# Altium PCB PCB1.PcbDoc
Units mm, origin at the board's own origin, x right, y up, seen from the top; angles counter-clockwise.
Board outline 47 x 47 mm, 4 copper layers (Top Layer, PowerAndSingle, Ground, Bottom Layer), stack 0.999 mm thick; 109 components, 73 nets, 430 pads, 292 vias.
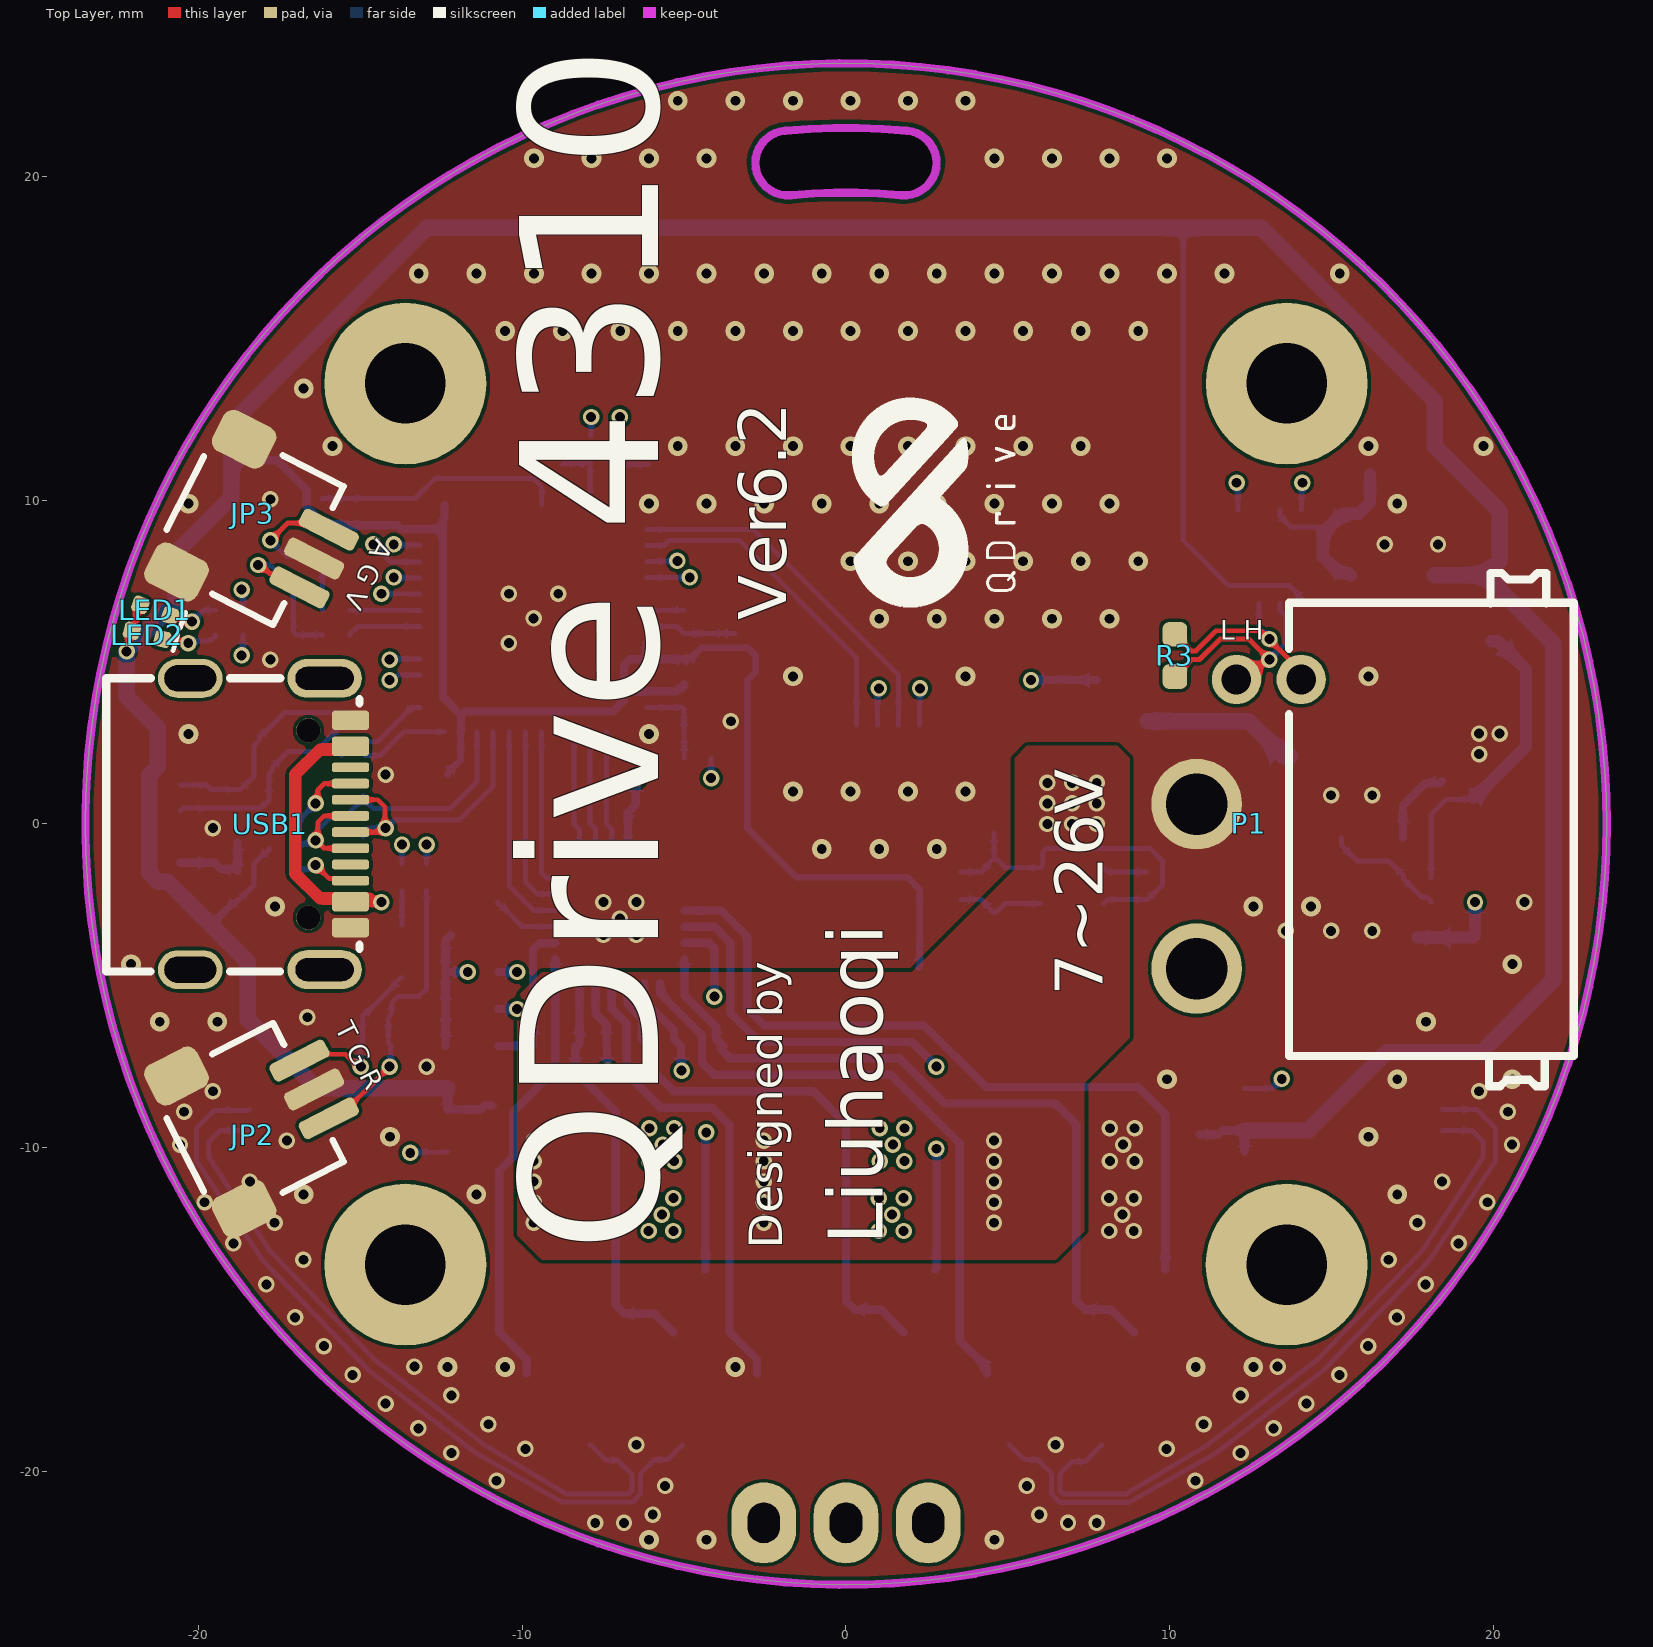
[diagram p0: Top Layer view]
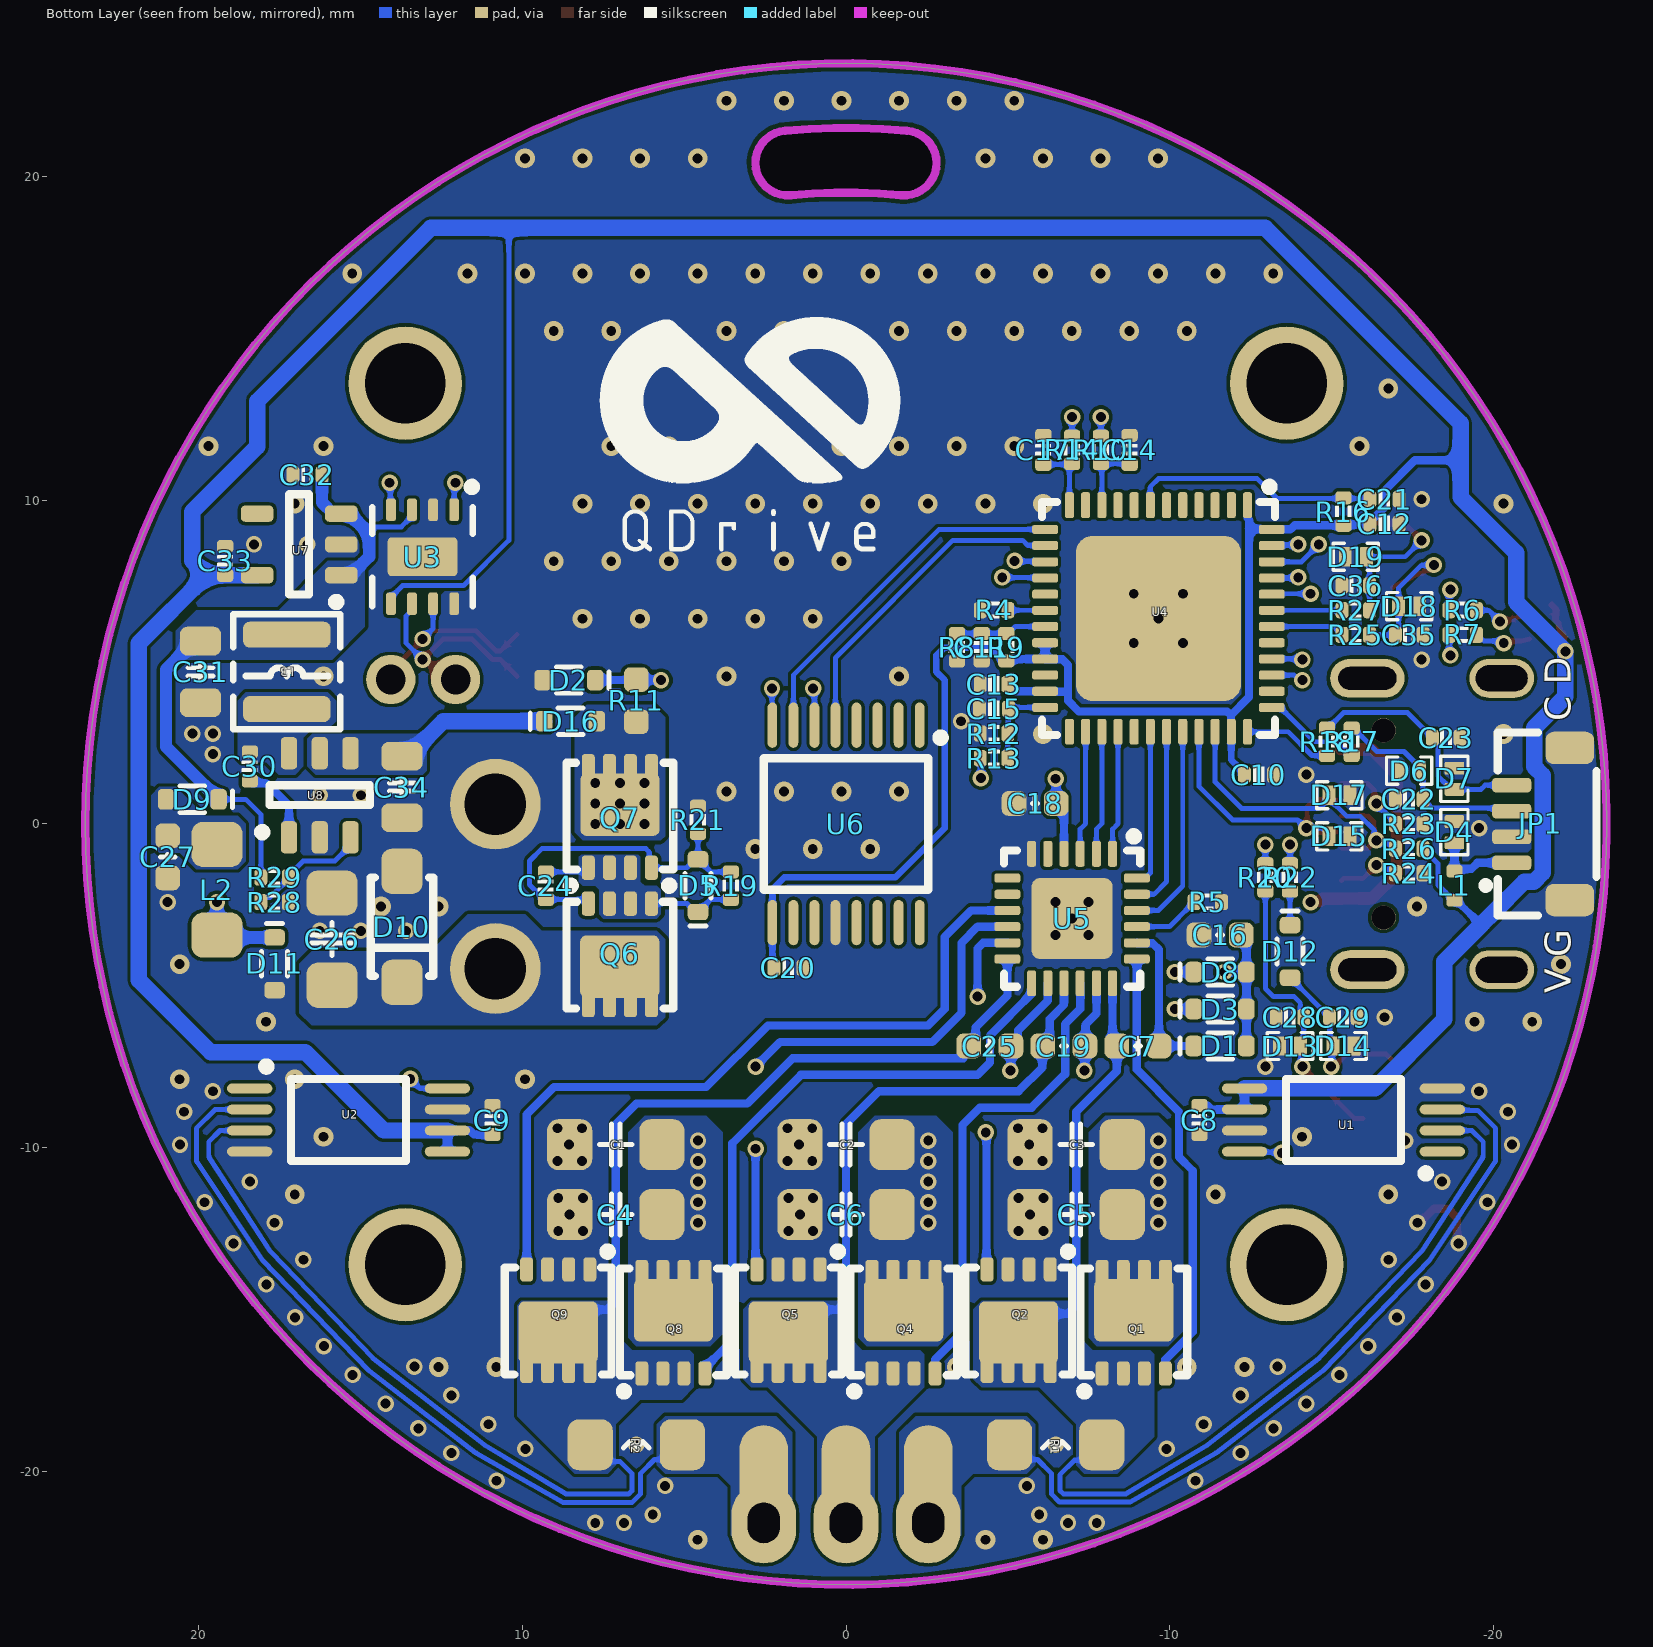
[diagram p1: Bottom Layer view, seen from below]
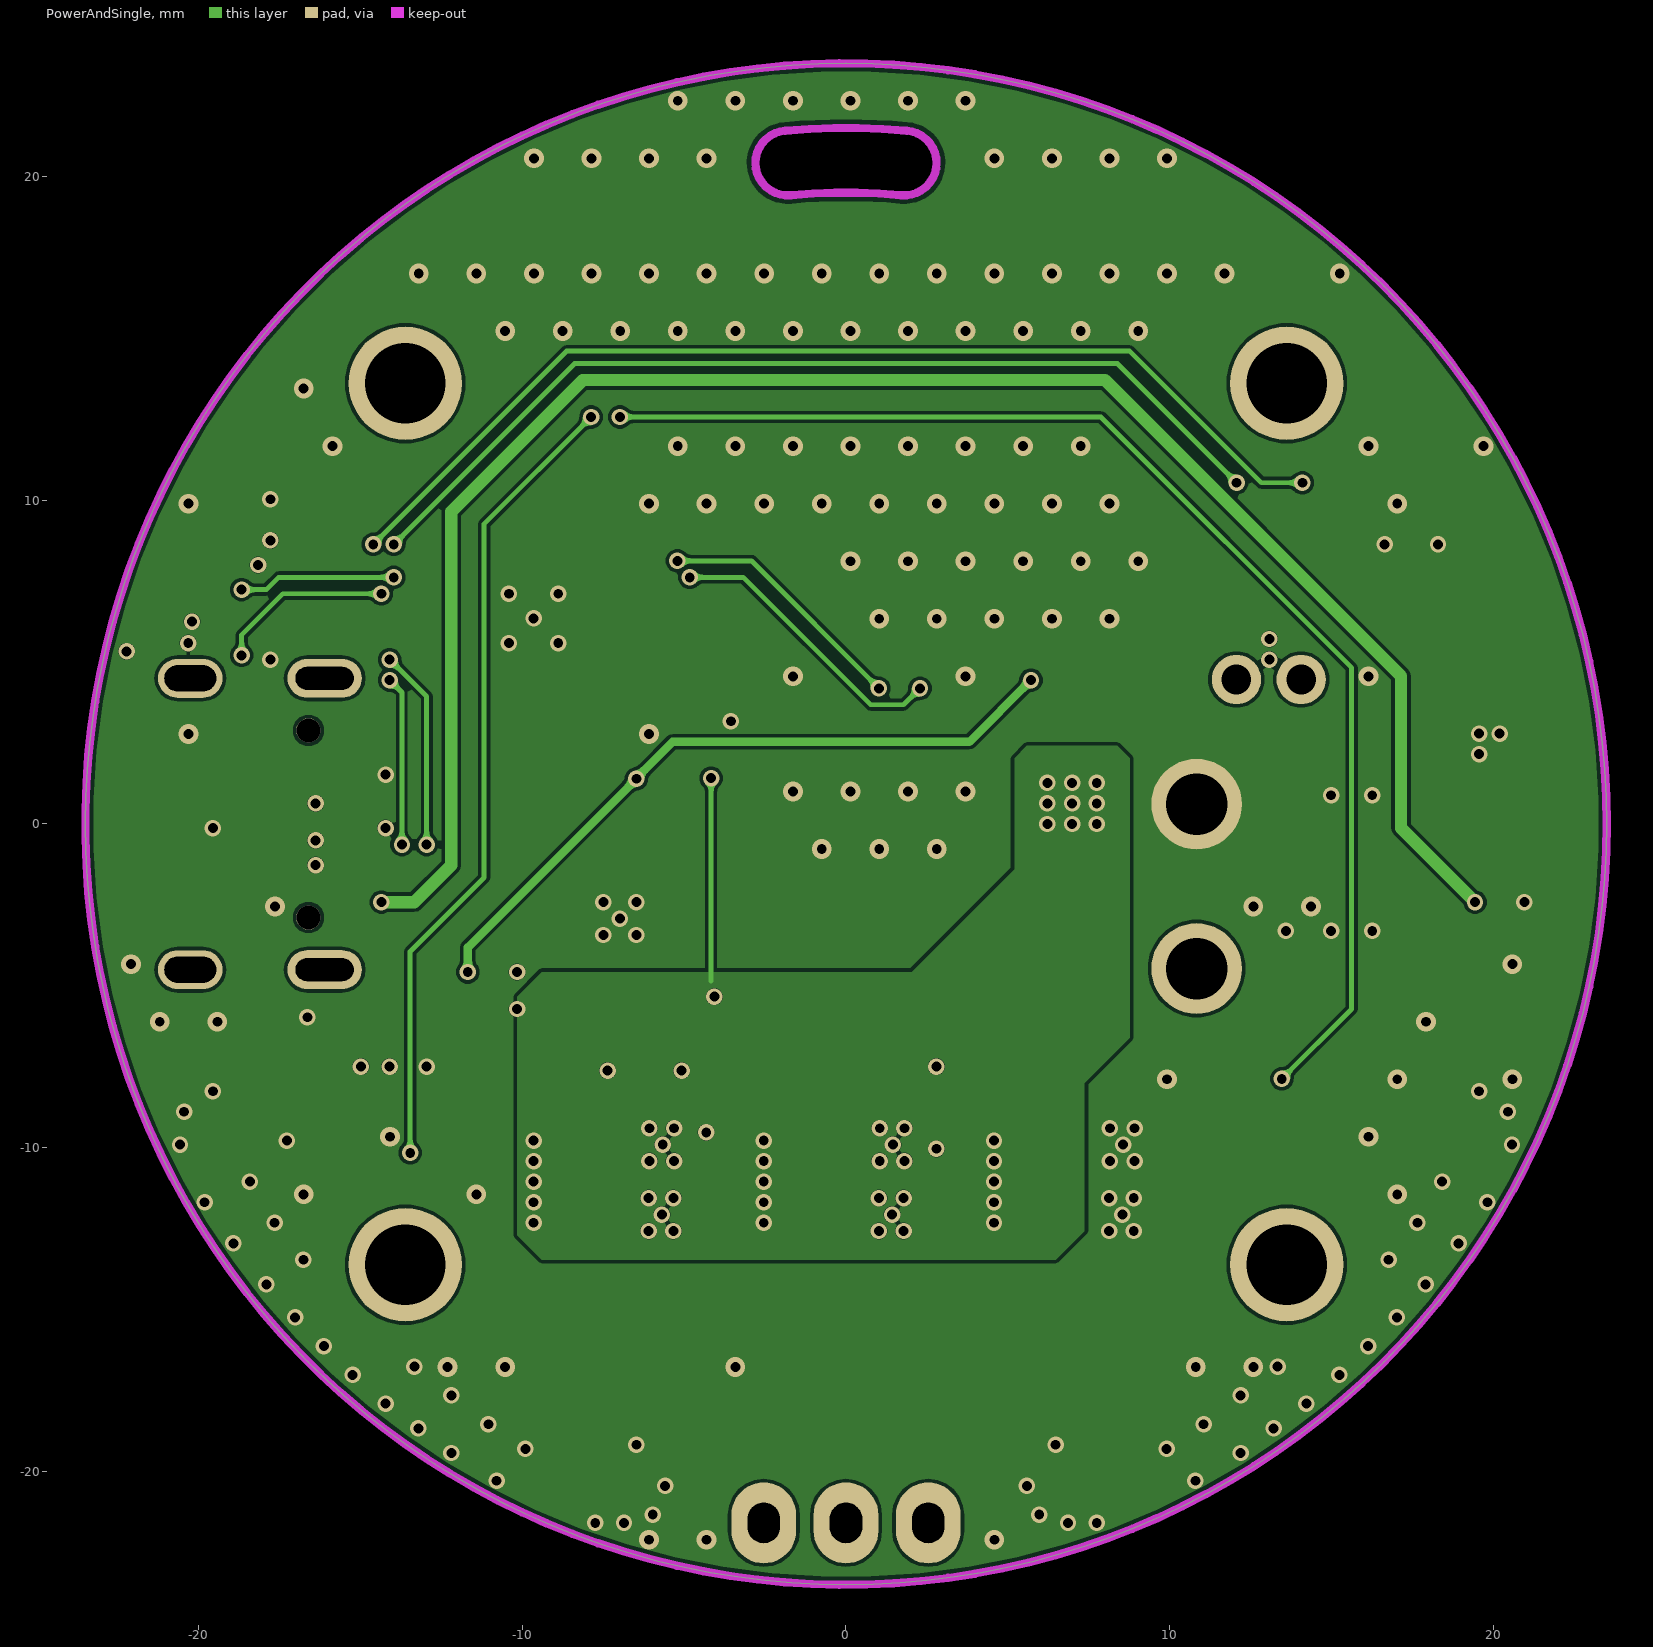
[diagram p2: PowerAndSingle]
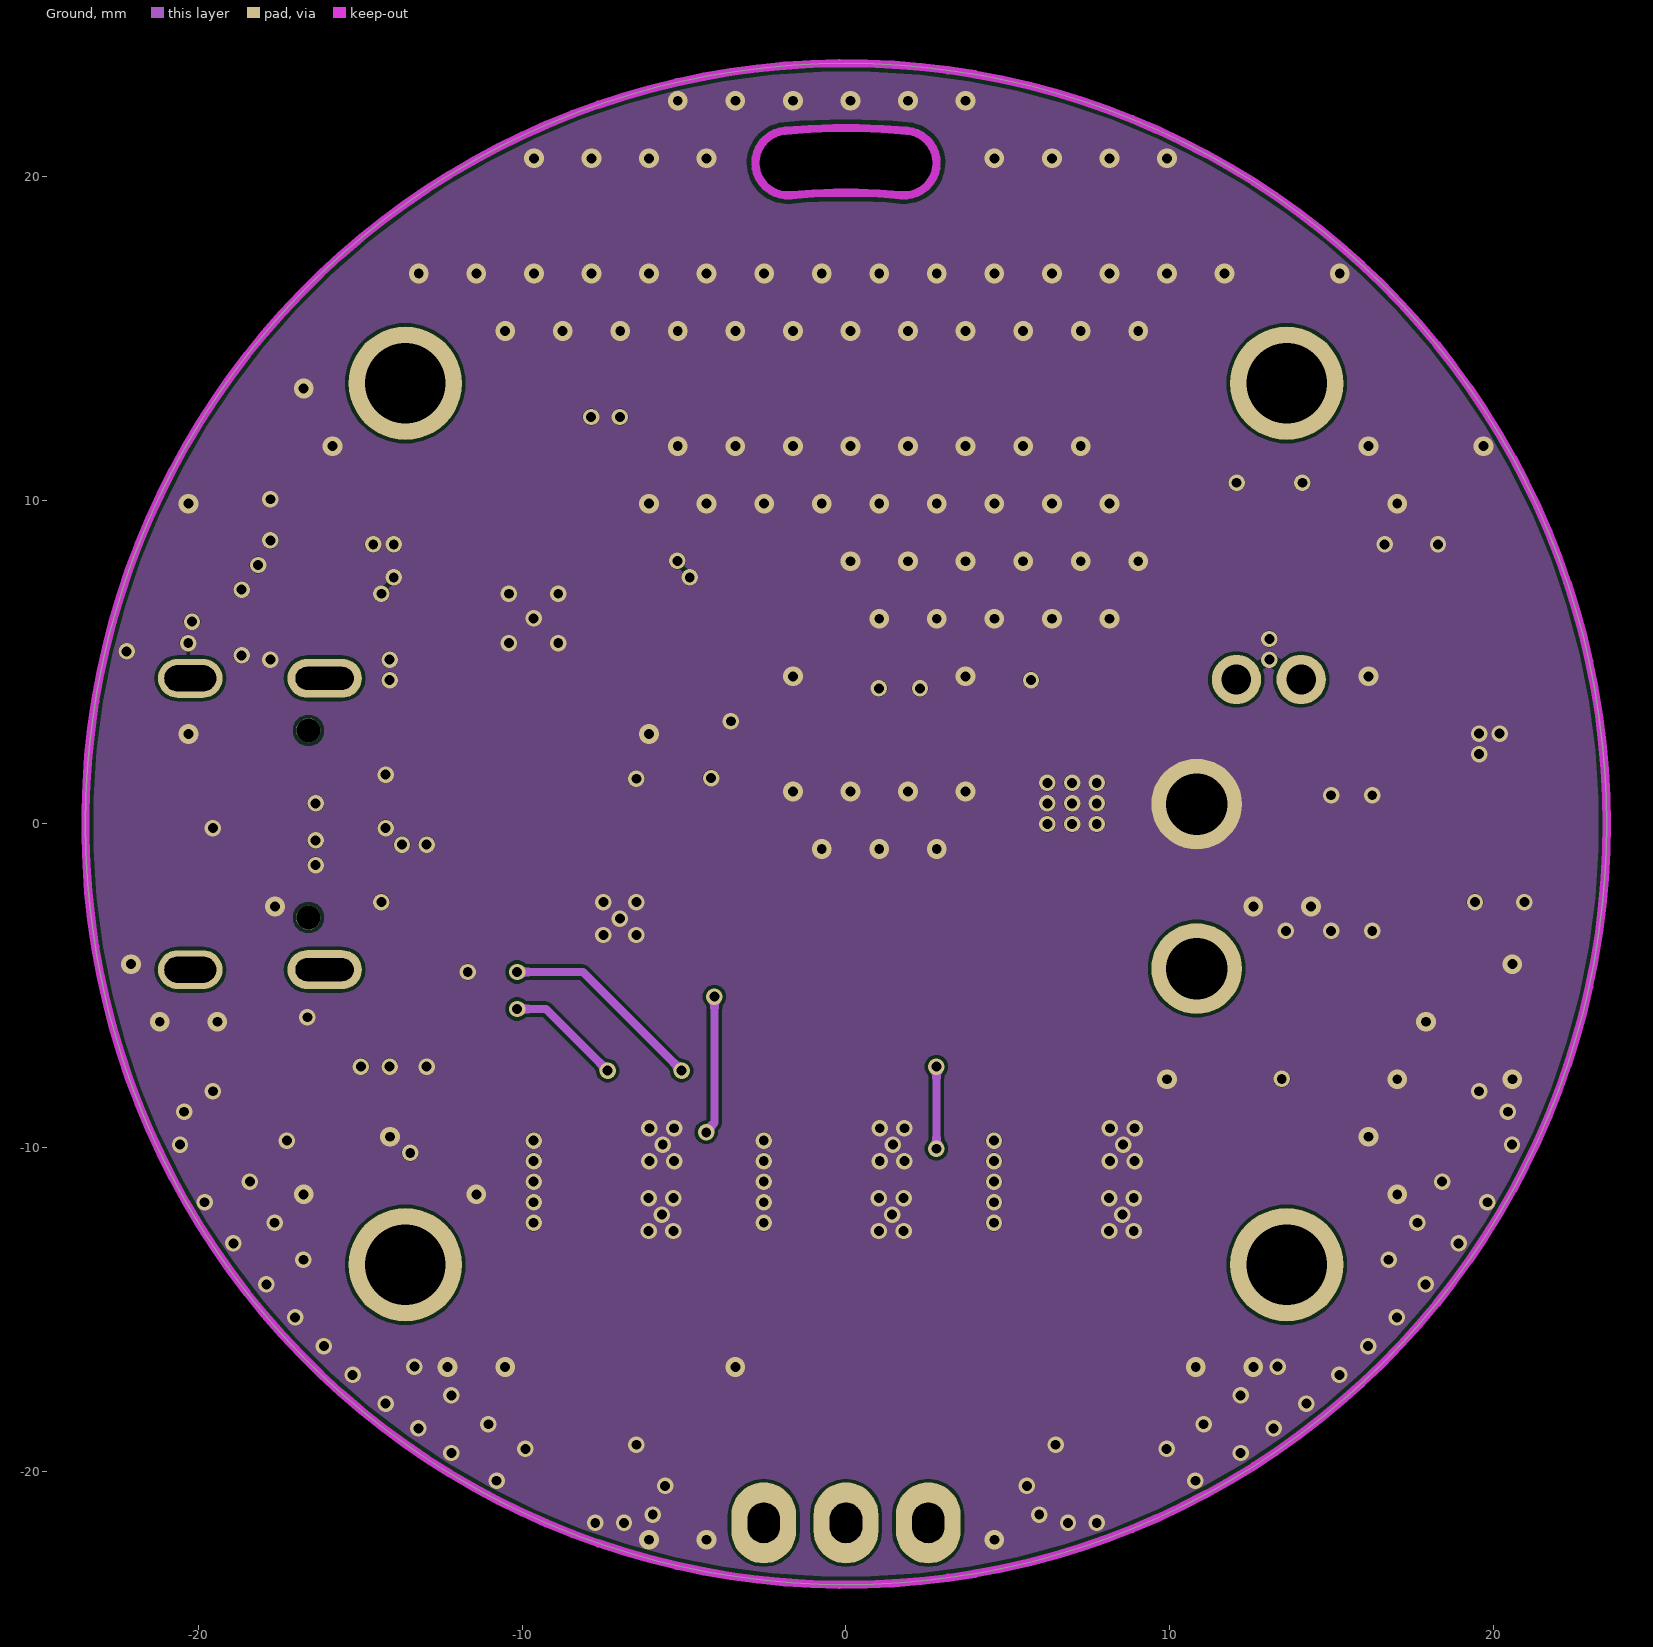
[diagram p3: Ground]
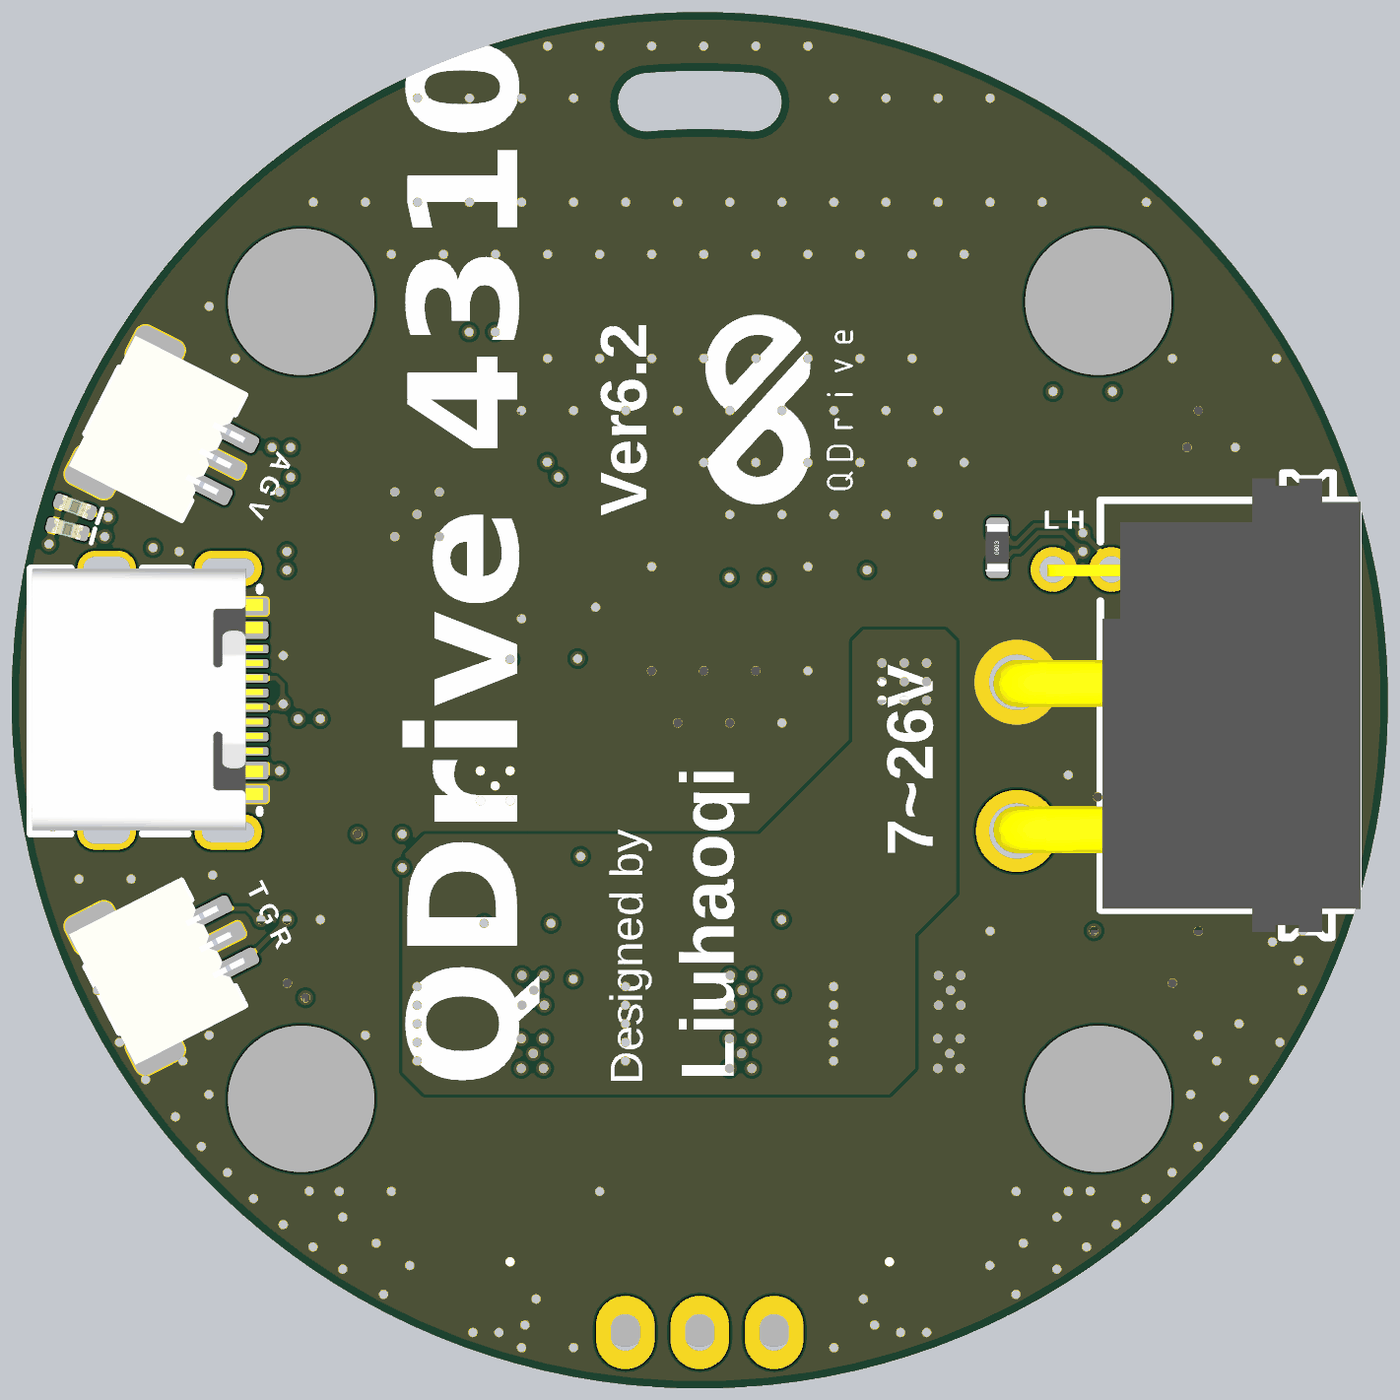
[diagram p4: 3D render of the assembled board from above, using the file's embedded part models]
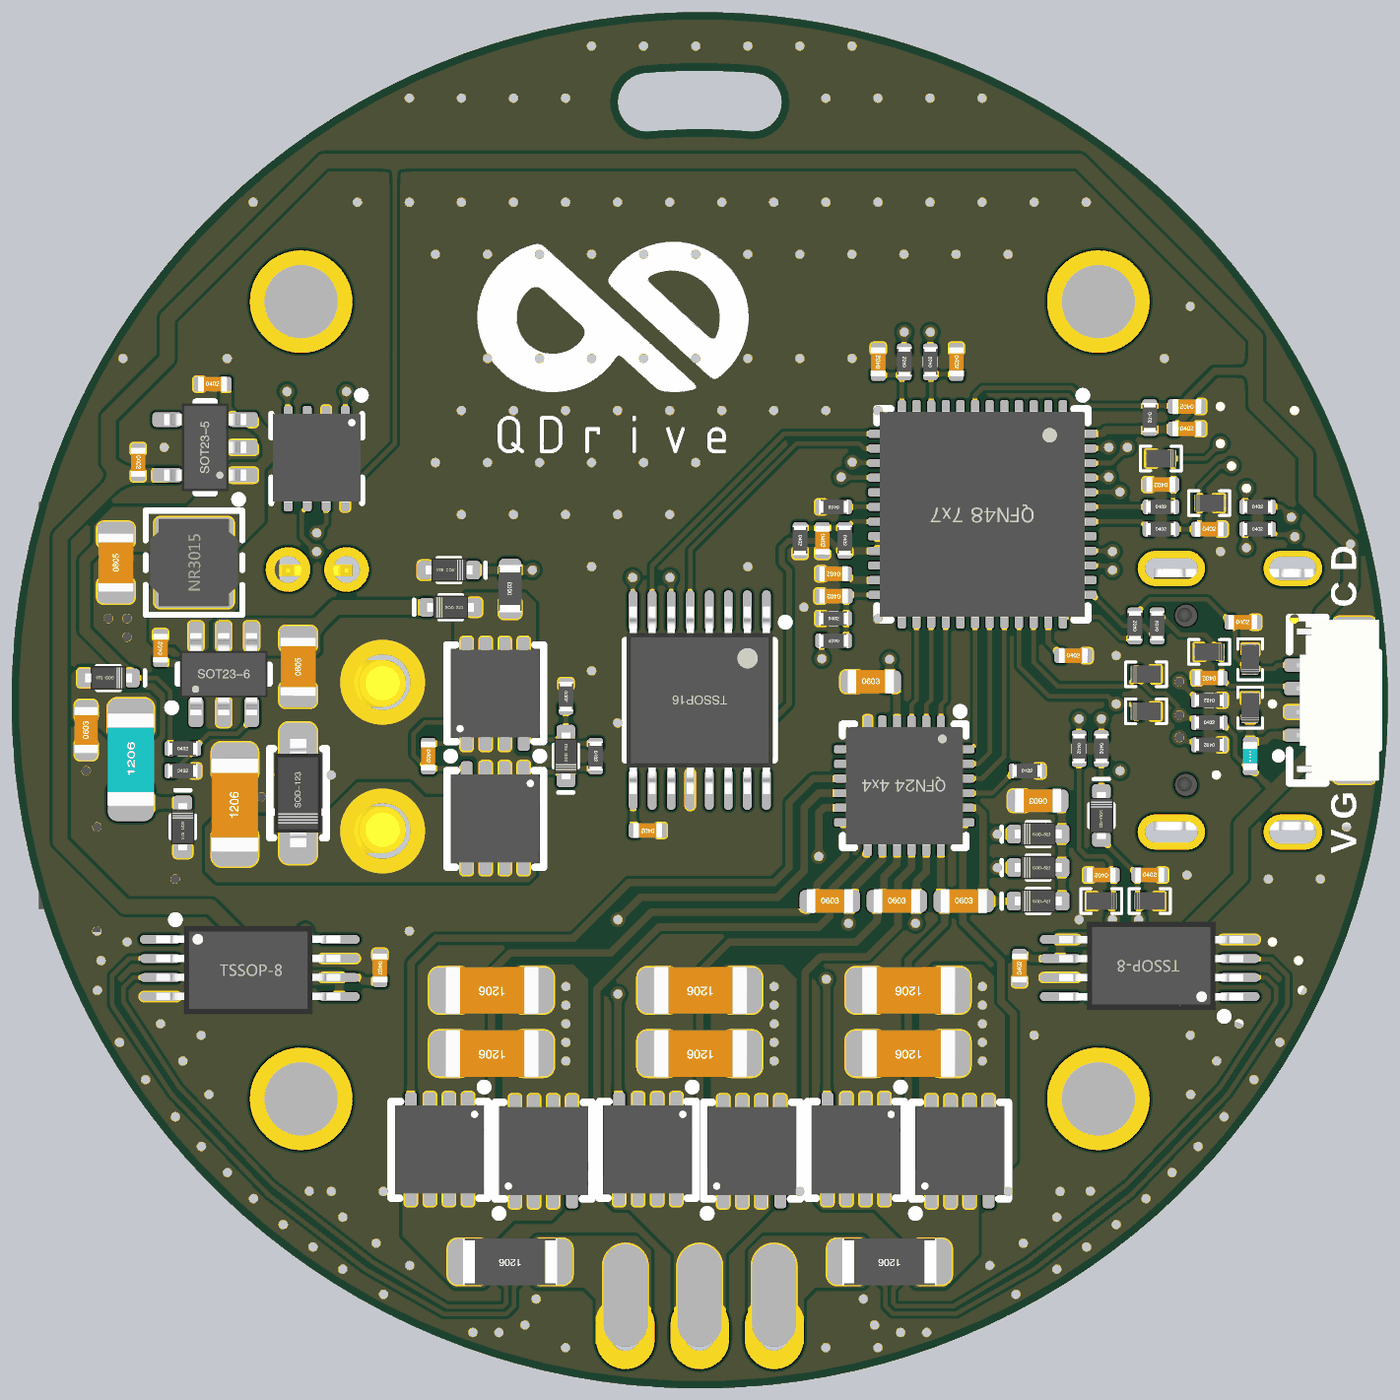
[diagram p5: 3D render of the assembled board from below, using the file's embedded part models]

## Layer stack, top to bottom
Top Solder: solder mask 0.0004, Solder Resist, Dk 3.5
Top Layer: signal copper 0.035
Dielectric 2: prepreg 0.0994, PP-006, Dk 4.1
PowerAndSingle: signal copper 0.0152
Dielectric 1: dielectric 0.7, FR-4, Dk 4.8
Ground: signal copper 0.0152
Dielectric 3: prepreg 0.0994, PP-006, Dk 4.1
Bottom Layer: signal copper 0.035
Bottom Solder: solder mask 0.0004, Solder Resist, Dk 3.5

## Board outline
0,-23.5 cw(c0,0) -23.5,0 cw(c0,0) 0,23.5 cw(c0,0) 23.5,0 cw(c0,0)
cut-out: -1.7,19.426 cw(c-1.799,20.421) -1.874,21.418 cw(c0,0) 1.874,21.418 cw(c1.799,20.421) 1.7,19.426 ccw(c0,0)

## Design rules (kind name [scope] priority, off if disabled: settings)
AcuteAngle [All] p1: minimum=4.50000000000000E+0001 checktracksonly=FALSE
BoardOutlineClearance [All] p1: gap=0.254 ignorepadtopadclearanceinfootprint=FALSE
Clearance [All] p1: gap=0.102 ignorepadtopadclearanceinfootprint=TRUE
ComponentClearance [All] p1: gap=0.241 collisioncheckmode=3 verticalgap=0.241 showdistances=FALSE
DiffPairsRouting DiffPairs_90OhmRouting [InDifferentialPairClass('DiffPair_90Ohm')] p1: maxlimit=0.254 minlimit=0.102 mostfreqgap=0.152 toplayer_minwidth=0.102 toplayer_maxwidth=0.381 toplayer_prefwidth=0.152 midlayer1_minwidth=0.102 midlayer1_maxwidth=0.381 midlayer1_prefwidth=0.152 midlayer2_minwidth=0.102 midlayer2_maxwidth=0.381 midlayer2_prefwidth=0.152 bottomlayer_minwidth=0.102 bottomlayer_maxwidth=0.381 bottomlayer_prefwidth=0.152 maxuncoupledlength=12.7
DiffPairsRouting [All] p2: maxlimit=0.254 minlimit=0.102 mostfreqgap=0.152 toplayer_minwidth=0.102 toplayer_maxwidth=0.381 toplayer_prefwidth=0.152 midlayer1_minwidth=0.102 midlayer1_maxwidth=0.381 midlayer1_prefwidth=0.152 midlayer2_minwidth=0.102 midlayer2_maxwidth=0.381 midlayer2_prefwidth=0.152 bottomlayer_minwidth=0.102 bottomlayer_maxwidth=0.381 bottomlayer_prefwidth=0.152 maxuncoupledlength=12.7
HoleSize [All] p1: absolutevalues=TRUE maxlimit=2.54 minlimit=0.127 maxpercent=80.000 minpercent=20.000
MinimumAnnularRing [All] p1: minimumring=0.076
MinimumSolderMaskSliver [All] p1: minsoldermaskwidth=0.081
PlaneClearance [All] p1: clearance=0.254
PlaneConnect [All] p1: planeconnectstyle=Direct reliefexpansion=0.508 reliefentries=4 reliefconductorwidth=0.254 reliefairgap=0.254
PolygonConnect [All] p1: connectstyle=Direct reliefconductorwidth=0.254 reliefentries=4 polygonreliefangle="90 Angle" airgapwidth=0.254
RoutingVias [All] p1: holewidth=0.305 width=0.61 viastyle="Through Hole" minholewidth=0.305 minwidth=0.406 maxholewidth=0.762 maxwidth=1.27
SMDEntry [All] p1: side=TRUE corner=TRUE anyangle=FALSE
SMDToCorner [All] p1: distance=0
SMDToPlane [All] p1: distance=0
SilkToSilkClearance [All] p1: silktosilkclearance=0
SilkToSolderMaskClearance [IsPad] p1: minsilkscreentomaskgap=0 clearancetoexposedcopper=TRUE
SolderMaskExpansion SolderMaskExpansion_Vias [IsVia] p1: expansion=0.064 istentingtop=TRUE
SolderMaskExpansion [All] p2: expansion=0.051 istentingtop=FALSE
SupplyNets "Schematic Supply Nets_5" [InNet('GVDD')] p1: voltage=0.000
SupplyNets "Schematic Supply Nets_4" [InNet('VBAT_IN')] p2: voltage=0.000
SupplyNets "Schematic Supply Nets_3" [InNet('GND')] p3: voltage=0.000
SupplyNets "Schematic Supply Nets_2" [InNet('+5')] p4: voltage=0.000
SupplyNets "Schematic Supply Nets_1" [InNet('VBAT')] p5: voltage=0.000
SupplyNets "Schematic Supply Nets" [InNet('+3.3')] p6: voltage=0.000
UnRoutedNet [All] p1: checkbadconnections=TRUE
Width [All] p1: maxlimit=7.62 minlimit=0.102 preferedwidth=0.254
21 further rules are at their usual default settings.

## Classes and differential pairs
net class POWER: +3.3 +5 VBAT VBUS

## Components (designator, comment, footprint, x,y, rotation, side; value= is the part's Value field where it differs from the comment)
C1 "22UF@35V" C1206_NS 7.112,-9.906 r0 bottom
C2 "22UF@35V" C1206_NS 0,-9.906 r0 bottom
C3 "22UF@35V" C1206_NS -7.112,-9.906 r0 bottom
C4 "22UF@35V" C1206_NS 7.112,-12.065 r0 bottom
C5 "22UF@35V" C1206_NS -7.112,-12.065 r0 bottom
C6 "22UF@35V" C1206_NS 0,-12.065 r0 bottom
C7 "1UF" C0603_NS -9.017,-6.858 r180 bottom
C8 "0.1UF" C0402_NS#1 -10.922,-9.144 r90 bottom
C9 "0.1UF" C0402_NS#1 10.922,-9.144 r270 bottom
C10 "0.1UF" C0402_NS#1 -12.758,1.524 r180 bottom
C11 "0.1UF" C0402_NS#2 -4.191,5.461 r270 bottom
C12 "0.1UF" C0402_NS#1 -16.637,9.271 r180 bottom
C13 "0.1UF" C0402_NS#2 -4.572,4.318 r0 bottom
C14 "0.1UF" C0402_NS#1 -8.763,11.557 r270 bottom
C15 "0.1UF" C0402_NS#1 -4.572,3.556 r0 bottom
C16 "1UF@35V" C0603_NS -11.557,-3.429 r0 bottom
C17 "0.1UF" C0402_NS#1 -6.096,11.557 r90 bottom
C18 "10UF@25V" C0603_NS -5.842,0.635 r180 bottom
C19 "1UF" C0603_NS -6.731,-6.858 r180 bottom
C20 "0.1UF" C0402_NS#1 1.778,-4.445 r0 bottom
C21 "0.1UF" C0402_NS#1 -16.637,10.033 r0 bottom
C22 "47PF" C0402_NS#2 -17.399,0.762 r0 bottom
C23 "47PF" C0402_NS#2 -18.542,2.667 r180 bottom
C24 "1UF" C0402_NS#2 9.271,-1.905 r270 bottom
C25 "1UF" C0603_NS -4.445,-6.858 r180 bottom
C26 "22UF@35V" C1206_NS 15.875,-3.556 r90 bottom
C27 "1UF" C0603_NS 20.955,-1.016 r90 bottom
C28 "47PF" C0402_NS#2 -13.716,-5.969 r0 bottom
C29 "47PF" C0402_NS#2 -15.367,-5.969 r180 bottom
C30 "0.1UF" C0402_NS#1 18.415,1.778 r90 bottom
C31 "10UF" C0805_NS 19.939,4.699 r90 bottom
C32 "1UF" C0402_NS#1 16.637,10.795 r180 bottom
C33 "1UF" C0402_NS#1 19.177,8.128 r270 bottom
C34 "4.7UF@35V" C0805_NS 13.716,1.143 r90 bottom
C35 "47PF" C0402_NS#2 -17.399,5.842 r180 bottom
C36 "47PF" C0402_NS#2 -15.748,7.366 r0 bottom
D1 "1N5819WT/NC" SOD-523 -11.557,-6.858 r0 bottom
D2 "BZX584C20" SOD-523 8.56,4.445 r180 bottom
D3 "1N5819WT/NC" SOD-523 -11.557,-5.715 r0 bottom
D4 "SLEN25NCBH" DFN1006-2L_L1.0_W0.6_P0.7 -18.796,-0.254 r90 bottom
D5 "BZX584C8V2" SOD-523 4.572,-1.905 r270 bottom
D6 "SLEN25NCBH" DFN1006-2L_L1.0_W0.6_P0.7 -17.399,1.651 r0 bottom
D7 "SLEN25NCBH" DFN1006-2L_L1.0_W0.6_P0.7 -18.796,1.397 r90 bottom
D8 "1N5819WT/NC" SOD-523 -11.557,-4.572 r0 bottom
D9 "1N5819WT" SOD-523 20.193,0.762 r180 bottom
D10 "SMF24CA" SOD-123 13.716,-3.175 r270 bottom
D11 "ESD5Z6.0" SOD-523 17.653,-4.318 r90 bottom
D12 "1N5819WT" SOD-523 -13.716,-3.937 r90 bottom
D13 "SLEN25NCBH" DFN1006-2L_L1.0_W0.6_P0.7 -13.716,-6.858 r0 bottom
D14 "SLEN25NCBH" DFN1006-2L_L1.0_W0.6_P0.7 -15.367,-6.858 r180 bottom
D15 "SLEN25NCBH" DFN1006-2L_L1.0_W0.6_P0.7 -15.24,-0.381 r180 bottom
D16 "1N5819WT" SOD-523 8.509,3.175 r0 bottom
D17 "SLEN25NCBH" DFN1006-2L_L1.0_W0.6_P0.7 -15.24,0.889 r180 bottom
D18 "SLEN25NCBH" DFN1006-2L_L1.0_W0.6_P0.7 -17.399,6.731 r180 bottom
D19 "SLEN25NCBH" DFN1006-2L_L1.0_W0.6_P0.7 -15.748,8.255 r0 bottom
JP1 "CON-4P" HC0.8-WT-4P -21.463,0 r90 bottom locked
JP2 "CON-3P" SH1.0-WT-3P -18.034,-9.017 r297 top
JP3 "CON-3P" SH1.0-WT-3P -18.034,9.017 r243 top
L1 "22nH@0.5A" L0402_NS -18.796,-1.905 r90 bottom
L2 "1uH@1A" L1206_NS 19.431,-2.032 r90 bottom
L3 "10uH" NR3015 17.272,4.699 r90 bottom
LED1 "绿色" LED0402_NS -21.336,6.604 r340 top
LED2 "红色" LED0402_NS -21.59,5.842 r345 top
P1 "XT30(2+2)" XT30(2+2)PW-M 12.446,0 r90 top locked
Q1 "AON7410" DFN8_L3.3_W3.3_P0.65 -8.89,-15.367 r180 bottom
Q2 "AON7410" DFN8_L3.3_W3.3_P0.65 -5.334,-15.367 r0 bottom
Q4 "AON7410" DFN8_L3.3_W3.3_P0.65 -1.778,-15.367 r180 bottom
Q5 "AON7410" DFN8_L3.3_W3.3_P0.65 1.778,-15.367 r0 bottom
Q6 "AON7401(ES)" DFN8_L3.3_W3.3_P0.65 6.985,-4.064 r0 bottom
Q7 "AON7401(ES)" DFN8_L3.3_W3.3_P0.65 6.985,0.254 r180 bottom
Q8 "AON7410" DFN8_L3.3_W3.3_P0.65 5.334,-15.367 r180 bottom
Q9 "AON7410" DFN8_L3.3_W3.3_P0.65 8.89,-15.367 r0 bottom
R1 "50mR" R1206_NS -6.477,-19.177 r0 bottom
R2 "50mR" R1206_NS 6.477,-19.177 r0 bottom
R3 "120R/NC" R0603_NS 10.16,5.207 r90 top
R4 "10K" R0402_NS -4.572,6.604 r0 bottom
R5 "40K/NC" R0402_NS -11.176,-2.413 r180 bottom
R6 "5.1K" R0402_NS -19.05,6.604 r180 bottom
R7 "2K" R0402_NS -19.05,5.842 r180 bottom
R8 "1K" R0402_NS -3.429,5.461 r270 bottom
R9 "75K" R0402_NS -4.953,5.461 r270 bottom
R10 "100R" R0402_NS -7.874,11.557 r90 bottom
R11 "510R" R0603_NS 6.477,3.81 r90 bottom
R12 "10K" R0402_NS -4.572,2.794 r180 bottom
R13 "75K" R0402_NS -4.572,2.032 r0 bottom
R14 "100R" R0402_NS -6.985,11.557 r90 bottom
R16 "10K" R0402_NS -15.367,9.652 r270 bottom
R17 "100R" R0402_NS -15.621,2.54 r90 bottom
R18 "100R" R0402_NS -14.859,2.54 r90 bottom
R19 "100K" R0402_NS 3.556,-1.905 r270 bottom
R20 "22R" R0402_NS -12.954,-1.651 r270 bottom
R21 "75K" R0402_NS 4.572,0.127 r270 bottom
R22 "22R" R0402_NS -13.716,-1.651 r270 bottom
R23 "5.1K" R0402_NS -17.399,0 r0 bottom
R24 "5.1K" R0402_NS -17.399,-1.524 r0 bottom
R25 "22R" R0402_NS -15.748,5.842 r180 bottom
R26 "1.5K" R0402_NS -17.399,-0.762 r180 bottom
R27 "22R" R0402_NS -15.748,6.604 r180 bottom
R28 "2K" R0402_NS 17.653,-2.413 r180 bottom
R29 "10K" R0402_NS 17.653,-1.651 r180 bottom
U1 "INA240A1" TSSOP8_L4.4_W3.0_P0.65 -15.367,-9.144 r0 bottom
U2 "INA240A1" TSSOP8_L4.4_W3.0_P0.65 15.367,-9.144 r180 bottom
U3 "SIT1051ATK/3" DFN8_L3.0_W3.0_P0.65 13.081,8.255 r0 bottom
U4 "STM32G431CBU6" QFN48_L7.0_W7.0_P0.5 -9.652,6.35 r0 bottom
U5 "DRV8300N" QFN24_L4.0_W4.0_P0.5 -6.985,-2.921 r0 bottom
U6 "MT6826S" TSSOP16_L5.0_W4.4_P0.65 0,0 r270 bottom
U7 "LN1134A332MR" SOT23-5_L3.0_W1.7_P0.95 16.891,8.636 r0 bottom
U8 "RY8411" SOT23-6_L3.0_W1.7_P0.95 16.256,0.889 r90 bottom
USB1 "USB_Type-C_16P_F" USB_Type-C_SMD_16P_F -17.78,0 r90 top locked

## Footprints (in the part's own frame and the unit in brackets; to place one, negate y for a bottom-side part, rotate by r counter-clockwise, add the part's x,y. Pads: shape width x height; smd on the part's side, far side on the other; paste and mask are expansions set on the pad)
C0402_NS#1 [mm] "贴片MLCC电容-无丝印"
  rrect50% 0.4x0.5 smd: 1(-0.45,0) 2(0.45,0)
  silkscreen extent -0.17,-0.23 0.17,0.23, body extent -0.5,-0.26 0.5,0.26, height 0.54
C0402_NS#2 [mm] "贴片MLCC电容-无丝印"
  rrect50% 0.4x0.5 smd: 1(-0.425,0) 2(0.425,0)
  silkscreen extent -0.17,-0.23 0.17,0.23, body extent -0.5,-0.26 0.5,0.26, height 0.54
C0603_NS [mil] "贴片MLCC电容-无丝印"
  rrect50% 30x30 smd: 1(-25.59,0) 2(25.59,0)
  silkscreen extent -3,-9 3,9, body extent -31,-16 31,16, height 33
C0805_NS [mil] "贴片MLCC电容-无丝印"
  rrect50% 35x50 smd: 1(-37.4,0) 2(37.4,0)
  silkscreen extent -10,-15 10,15, body extent -39,-24 39,24, height 22
C1206_NS [mil] "贴片MLCC电容-无丝印"
  rrect50% 55x62 smd: 1(-56.1,0) 2(56.1,0)
  silkscreen extent -20,-25 20,25, body extent -64,-32 62,32, height 50
DFN8_L3.0_W3.0_P0.65 [mm] "8脚，长x宽x高：3.0x3.0x0.8mm，脚距：0.65mm"
  rrect50% 0.3x0.7 smd: 1(-0.975,-1.45) 2(-0.325,-1.45) 3(0.325,-1.45) 4(0.975,-1.45) 5(0.975,1.45) 6(0.325,1.45) 7(-0.325,1.45) 8(-0.975,1.45)
  rrect20% 2.15x1.2 smd: 9(0,0)
  silkscreen extent -1.65,-2.29 1.55,1.53, body extent -1.5,-1.53 1.5,1.49, height 0.91
DFN8_L3.3_W3.3_P0.65 [mm] "8脚，长x宽x高：3.3x3.3x0.8mm，脚距：0.65mm"
  rrect50% 0.401x0.75 smd paste+0: 1(-0.975,-1.605) 2(-0.325,-1.605) 3(0.325,-1.605) 4(0.975,-1.605)
  rrect50% 0.401x0.856 smd: 5(-0.975,1.478) 6(-0.325,1.478) 7(0.325,1.478) 8(0.975,1.478)
  rrect20% 2.449x1.928 smd: 9(0.003,0.341)
  silkscreen extent -1.65,-2.29 1.65,1.64, body extent -1.5,-1.53 1.5,1.49, height 0.91
DFN1006-2L_L1.0_W0.6_P0.7 [mm] "2脚，长x宽x高：1.0x0.6x0.5mm，脚距：0.7mm"
  rrect20% 0.4x0.6 smd: 1(-0.325,0) 2(0.325,0)
  silkscreen extent -0.7,-0.42 0.7,0.42, body extent -0.51,-0.31 0.51,0.31, height 0.48
HC0.8-WT-4P [mm] "HC0.8连接器-卧贴-4P"
  rrect50% 1x1.5 smd: 0(-2.35,-0.898) 0(2.35,-0.898)
  rrect50% 0.45x1.208 smd: 1(-1.2,0.898) 2(-0.4,0.898) 3(0.4,0.898) 4(1.2,0.898)
  silkscreen extent -2.83,-1.72 2.83,1.8, body extent -2.75,-1.73 2.75,1.09, height 1.85
L0402_NS [mm] "小功率贴片电感"
  rrect50% 0.4x0.5 smd: 1(-0.45,0) 2(0.45,0)
  body extent -0.5,-0.25 0.5,0.25, height 0.5
L1206_NS [mil] "小功率贴片电感"
  rrect50% 55x62 smd: 1(-55.12,0) 2(55.11,0)
  body extent -63,-31 63,31, height 35
LED0402_NS [mil] "0402LED"
  rrect50% 20x20 smd: 1(-19.23,0) 2(19.23,0)
  silkscreen extent 35,-10 36,10, body extent -20,-10 20,10, height 8
NR3015 [mm] "3.0mm*3.0mm*1.5mm(长*宽*高）"
  rrect50% 0.8x2.7 smd: 1(-1.15,0) 2(1.15,0)
  silkscreen extent -1.78,-1.65 1.78,1.65, body extent -1.5,-1.5 1.5,1.5, height 1.6
QFN24_L4.0_W4.0_P0.5 [mm] "24脚，长x宽x高：4.0x4.0x1.0mm，脚距：0.5mm"
  rrect50% 0.28x0.8 smd: 1(-1.25,-2) 2(-0.75,-2) 3(-0.25,-2) 4(0.25,-2) 5(0.75,-2) 6(1.25,-2) 13(1.25,2) 14(0.75,2) 15(0.25,2) 16(-0.25,2) 17(-0.75,2) 18(-1.25,2)
  rrect50% 0.8x0.28 smd: 7(2,-1.25) 8(2,-0.75) 9(2,-0.25) 10(2,0.25) 11(2,0.75) 12(2,1.25) 19(-2,1.25) 20(-2,0.75) 21(-2,0.25) 22(-2,-0.25) 23(-2,-0.75) 24(-2,-1.25)
  rrect20% 2.5x2.5 smd: 25(0,0)
  silkscreen extent -2.11,-2.67 2.11,2.11, body extent -2.01,-2.01 2.01,2.01, height 0.95
QFN48_L7.0_W7.0_P0.5 [mm] "48脚，长x宽x高：7.0x7.0x1.0mm，脚距：0.5mm"
  rrect50% 0.28x0.8 smd: 1(-2.75,-3.5) 2(-2.25,-3.5) 3(-1.75,-3.5) 4(-1.25,-3.5) 5(-0.75,-3.5) 6(-0.25,-3.5) 7(0.25,-3.5) 8(0.75,-3.5) 9(1.25,-3.5) 10(1.75,-3.5) 11(2.25,-3.5) 12(2.75,-3.5) 25(2.75,3.5) 26(2.25,3.5) 27(1.75,3.5) 28(1.25,3.5) 29(0.75,3.5) 30(0.25,3.5) 31(-0.25,3.5) 32(-0.75,3.5) 33(-1.25,3.5) 34(-1.75,3.5) 35(-2.25,3.5) 36(-2.75,3.5)
  rrect50% 0.8x0.28 smd: 13(3.5,-2.75) 14(3.5,-2.25) 15(3.5,-1.75) 16(3.5,-1.25) 17(3.5,-0.75) 18(3.5,-0.25) 19(3.5,0.25) 20(3.5,0.75) 21(3.5,1.25) 22(3.5,1.75) 23(3.5,2.25) 24(3.5,2.75) 37(-3.5,2.75) 38(-3.5,2.25) 39(-3.5,1.75) 40(-3.5,1.25) 41(-3.5,0.75) 42(-3.5,0.25) 43(-3.5,-0.25) 44(-3.5,-0.75) 45(-3.5,-1.25) 46(-3.5,-1.75) 47(-3.5,-2.25) 48(-3.5,-2.75)
  rrect20% 5.1x5.1 smd: 49(0,0)
  silkscreen extent -3.6,-4.19 3.6,3.6, body extent -3.51,-3.51 3.51,3.51, height 1
R0402_NS [mm] "1/16W贴片电阻-无丝印"
  rrect50% 0.4x0.5 smd: 1(-0.425,0) 2(0.425,0)
  silkscreen extent -0.17,-0.24 0.17,0.24, body extent -0.5,-0.25 0.5,0.25, height 0.3
R0603_NS [mil] "1/10W贴片电阻-无丝印"
  rrect50% 30x30 smd: 1(-25.59,0) 2(25.59,0)
  body extent -31,-16 32,16, height 16
R1206_NS [mil] "1/4W贴片电阻-无丝印"
  rrect50% 55x62 smd: 1(-56.1,0) 2(56.1,0)
  silkscreen extent -16,-4 16,4, body extent -63,-31 63,31, height 22
SH1.0-WT-3P [mm] "SH1.0连接器-卧贴-3P"
  rrect50% 1.4x1.8 smd: 0(-2.3,-1.8) 0(2.3,-1.8)
  rrect50% 0.6x1.9 smd: 1(1,1.8) 2(0,1.8) 3(-1,1.8)
  silkscreen extent -2.4,-2.67 2.4,1.6, body extent -2.5,-2.66 2.5,2.29, height 2.9
SOD-123 [mil] "2.7x1.6X1.1mm（长宽高，不包括引脚）"
  rrect50% 55x50 smd: 1(-67.5,0) 2(67.5,0)
  silkscreen extent -60,-38 60,38, body extent -73,-31 73,31, height 50
SOD-523 [mil] "1.2x0.8X0.6mm（长宽高，不包括引脚）"
  rrect50% 20x25 smd: 1(-32,0) 2(32,0)
  silkscreen extent -15,-16 49,16, body extent -31,-16 31,16, height 26
SOT23-5_L3.0_W1.7_P0.95 [mm] "5脚，长x宽x高：3.0x1.7x1.45mm，脚距：0.95mm"
  rrect50% 1x0.5 smd: 1(-1.3,0.95) 2(-1.3,0) 3(-1.3,-0.95) 4(1.3,-0.95) 5(1.3,0.95)
  silkscreen extent -1.27,-1.55 0.3,1.9, body extent -1.4,-1.5 1.4,1.5, height 1.15
SOT23-6_L3.0_W1.7_P0.95 [mm] "6脚，长x宽x高：3.0x1.7x1.45mm，脚距：0.95mm"
  rrect50% 1x0.5 smd: 1(-1.3,0.95) 2(-1.3,0) 3(-1.3,-0.95) 4(1.3,-0.95) 5(1.3,0) 6(1.3,0.95)
  silkscreen extent -1.27,-1.55 0.3,1.91, body extent -1.4,-1.5 1.4,1.5, height 1.15
TSSOP8_L4.4_W3.0_P0.65 [mm] "8脚，长x宽x高：4.4x3.0x1.0mm，脚距：0.65mm"
  oval 1.4x0.3 smd: 1(-3.054,0.975) 2(-3.054,0.325) 3(-3.054,-0.325) 4(-3.054,-0.975) 5(3.054,-0.975) 6(3.054,-0.325) 7(3.054,0.325) 8(3.054,0.975)
  silkscreen extent -2.67,-1.27 1.78,1.78, body extent -3.19,-1.58 3.09,1.42, height 1.12
TSSOP16_L5.0_W4.4_P0.65 [mm] "16脚，长x宽x高：5.0x4.4x1.0mm，脚距：0.65mm"
  oval 1.4x0.3 smd: 1(-3.054,2.275) 2(-3.054,1.625) 3(-3.054,0.975) 4(-3.054,0.325) 5(-3.054,-0.325) 6(-3.054,-0.975) 7(-3.054,-1.625) 8(-3.054,-2.275) 9(3.046,-2.275) 10(3.046,-1.625) 11(3.046,-0.975) 12(3.046,-0.325) 13(3.046,0.325) 14(3.046,0.975) 15(3.046,1.625) 16(3.046,2.275)
  silkscreen extent -2.79,-2.54 2.03,3.05, body extent -3.2,-2.5 3.2,2.5, height 1.03
USB_Type-C_SMD_16P_F [mm] "USB_Type-C贴片母座16P"
  oval 1.2x2.3 hole 0.7 slot 1.8 at 90 deg: 0(-4.5,-1.675) 0(4.5,-1.675)
  oval 1.2x2 hole 0.8 slot 1.6 at 90 deg: 0(-4.5,2.475) 0(4.5,2.475)
  rrect50% 0.4x1.15 smd: A1(3.3,-2.473) A4(2.5,-2.471) A9(-2.5,-2.475) A12(-3.3,-2.475) B1(-3.1,-2.475) B4(-2.3,-2.475) B9(2.3,-2.471) B12(3.1,-2.473)
  rrect50% 0.3x1.15 smd: A5(1.25,-2.475) A6(0.25,-2.475) A7(-0.25,-2.473) B5(-1.75,-2.475) B6(-0.75,-2.475) B7(0.75,-2.473)
  rrect50% 0.3x1.148 smd: A8(1.75,-2.475) B8(-1.25,-2.475)
  round 0.75 hole 0.75 unplated: ""(-2.89,-1.175) ""(2.89,-1.175)
  silkscreen extent -4.56,-2.75 4.5,5.08, body extent -4.44,-2.87 4.5,5.03, height 3.25
XT30(2+2)PW-M [mil]
  round 110.24 hole 74.8 paste-99999 mask+1.97: 1(-175.79,63.59) 2(24.21,63.59)
  round 60 hole 36 paste-99999 mask+1.97: 3(175.79,15.15) 4(175.79,-63.59)
  silkscreen extent -319,-395 305,-49, body extent -312,-398 298,95, height 204

## Part data
C1 C2 C3 C4 C5 C6 C7 C8 C9 C10 C11 C12 C13 C14 C15 C16 C17 C18 C19 C20 C21 C22 C23 C24 C25 C26 C27 C28 C29 C30 C31 C32 C33 C34 C35 C36: library part C, "贴片电容/MLCC电容", BOM名称=MLCC
D1 D3 D8 D9 D12 D16: library part SSXX, "肖特基二极管", BOM名称=肖特基二极管, 属性=个位*10V/十位A
D2 D5: library part MM1ZXX, "稳压二极管", Power Dissipation (Pd)=500mW, Voltage=5.1V, BOM名称=稳压二极管
D4 D6 D7 D13 D14 D15 D17 D18 D19: library part PESD5V0F1BL, "双向静电和浪涌保护(TVS/ESD)", BOM名称=PESD5V0F1BL
D10 D11: library part TVS, "TVS通用", BOM名称=TVS
JP1: library part "Header 4", "4P连接器", BOM名称=4P连接器
JP2 JP3: library part "Header 3", "3P连接器", BOM名称=3P连接器
L1 L2: library part L, "小功率贴片电感", BOM名称=小功率贴片电感
L3: library part L-NR, "太诱-NR磁胶电感", BOM名称=NR磁胶电感
LED1 LED2: library part LED, "贴片LED", BOM名称=贴片LED
P1: "XT30(2+2)连接器"
Q1 Q2 Q4 Q5 Q8 Q9: library part WSD3066DN33, "类型:N沟道;漏源电压(Vdss):30V;连续漏极电流(Id):50A;导通电阻(RDS(on)Vgs,Id):5.7mΩ@10V,35A;阈值电压(Vgs(th)@Id):2.5V@250uA;", Continuous Drain Current (Id)=50A, Drain Source On Resistance (RDS(on)@Vgs,Id)=5.7mΩ@10V,35A, Drain Source Voltage (Vdss)=30V, Gate Threshold Voltage (Vgs(th)@Id)=2.5V@250uA, LCSC Part Name="N沟道 30V 50A", Power Dissipation (Pd)=45W, Device=WSD3066DN33, Supplier Footprint="DFN 3.3x3.3-8", Type=N沟道
Q6 Q7: library part FH13P04G6, "类型:P沟道;漏源电压(Vdss):30V;连续漏极电流(Id):30A;功率(Pd):30W;导通电阻(RDS(on)@Vgs,Id):13mΩ@10V,8A;", Continuous Drain Current (Id)=30A, Drain Source On Resistance (RDS(on)@Vgs,Id)=9mΩ@10V,15A, LCSC Part Name="P沟道 40V 30A", Power Dissipation (Pd)=20W, Device=FH13P04G6, Supplier Footprint=PDFN-8(3.3*3.3), Type=P沟道
R1 R2 R3 R4 R5 R6 R7 R8 R9 R10 R11 R12 R13 R14 R16 R17 R18 R19 R20 R21 R22 R23 R24 R25 R26 R27 R28 R29: library part R, "贴片电阻", BOM名称=贴片电阻
U1 U2: library part INA240, "具有增强的 PWM 抑制能力的 -4V 至 80V、双向、超精密电流感应放大器"
U3: "5V 供电， IO 口兼容 3.3V，± 70V 总线耐压， CAN FD 静音模式总线收发器", Data Rate=5Mbps, Duplex=Half, Protocol=CAN, Type=Transceiver
U4: "Microcontroller 32-Bit ARM Cortex-M4 RISC 128KB Flash 1.71V to 3.6V QFN48", Ambient Temperature Range High=+85°C, Ambient Temperature Range Low=-40°C, Frequency=170MHz, Manufacturer=STMicroelectronics, Manufacturer Part Number=STM32G431CBT6, Max Junction Temp=+105°C, Max Supply Voltage=3.6V, Min Supply Voltage=1.62V, Package=LQFP48, Temperature="-40°C to +85°C", Automotive=No, Category=IC, ComponentLink2Description=Datasheet, ComponentLink2URL=https://www.st.com/resource/en/datasheet/stm32g431cb.pdf, Core Architecture="Arm Cortex-M4", Data Bus Width=32bits, Device Class L1="Integrated Circuits (ICs)", Device Class L2="Embedded Processors and Controllers", Device Class L3=Microcontrollers, Digikey Description="MAINSTREAM ARM CORTEX-M4+ MCU 17", Height=1.6mm, Interface=I2C,SPI,UART,USART,CAN,USB,LIN,IrDA,I2S, Lead Free=Yes, Memory Size=128KBytes, Memory Type=FLASH, Number Of A/D Converters=1, Number Of Adc Channels=17, Number Of Cores=1, Number Of I2C Channels=3, Number Of I/Os=38, Number Of Pwm Channels=31, Number Of Spi Channels=3, Number Of Timers/Counters=14, Number Of Uart Channels=4, Number Of Usb Channels=1, Octopart=https://octopart.com/stm32g431cbt6-stmicroelectronics-98835224, Ram Size=32KBytes, RoHS=TRUE, Standoff Height=0.05mm, Temperature Range High=+85°C, Temperature Range Low=-40°C
U5: library part DRV8300D, "具有自举二极管的最大 100V 简单三相栅极驱动器"
U6: "15位高分辨率、高速磁性角度编码器IC"
U7: library part RT9013-33GB
U8: library part JW5026, "40V/1A/1.1MHz同步降压转换器"
USB1: "USB_Type-C母座", BOM名称=USB_Type-C母座

## Free pads (board coordinates)
  oval 1.5x3.5 smd far side: 6(-2.54,-20.32) 6(0,-20.32) 6(2.54,-20.32)
  oval 2x2.5 hole 1 slot 1.25 at 90 deg: 7(-2.54,-21.59) 7(0,-21.59) 7(2.54,-21.59)
  round 3.5 hole 2.495 mask+0.05: AA22(-13.612,-13.612) AA22(-13.612,13.612) AA22(13.612,-13.612) AA22(13.612,13.612)
  round 5 smd mask+0.05: AA23(-13.612,-13.612) AA23(-13.611,13.606) AA23(13.612,-13.612) AA23(13.613,13.606)

## Via types
v1: diameter 0.508, hole 0.305, Top Layer to Bottom Layer, tented both sides, 180 vias
v2: diameter 0.61, hole 0.305, Top Layer to Bottom Layer, tented both sides, 112 vias

## Nets (pads, with @x,y where several pads share a name; then routed paths per layer and width w, separated by ;. In a path a pad name is that pad's centre, name@x,y a point inside that pad or via, vN(x,y) a via of type N, cw(c..) or ccw(c..) an arc to the next point about the centre after c; other vN are vias at no path point)
+3.3: C8.2 C9.2 C10.1 C12.1 C13.1 C20.2 C33.2 L1.1 LED1.1 LED2.1 R9.2 R16.2 R26.2 U1.5 U1.6 U2.5 U2.6 U3.5 U4.1 U4.20 U4.21 U4.23 U4.35 U4.48 U6.9 U7.5 | length 170.2
  Top Layer w0.203: v1(-22.225,5.334) -22.225,5.416 -22.161,5.48 -22.161,5.869 LED2.1 -21.996,6.214 -21.924,6.286 -21.924,6.642 LED1.1
  Bottom Layer w0.152: L1.1@-18.73,-2.326 -18.288,-1.884 -18.288,-1.226 -17.983,-0.921 -17.946,-0.921 -17.824,-0.799 R26.2 ; 10.414,18.415 10.414,8.763 11.811,7.366 13.695,7.366 14.056,7.005 U3.5
  Bottom Layer w0.203: -19.616,-3.117 -18.952,-2.453 -18.894,-2.453 L1.1 ; C10.1 -12.308,1.574 -11.902,1.98 U4.35 ; R9.2 -4.855,5.134 -4.771,5.134 -4.467,5.439 -3.026,5.439 -2.794,5.207 -2.794,4.699 -3.048,4.445 -3.048,-0.127 -1.524,-1.651 1.905,-1.651 2.275,-2.021 U6.9 2.275,-4.398 C20.2
  Bottom Layer w0.254: -18.987,11.239 -17.579,11.239 -16.658,10.319 -16.658,9.79 -16.423,9.554 -16.42,9.554 -16.187,9.321 C12.1 ; C12.1@-16.165,9.249 -15.389,9.249 R16.2 -13.861,9.227 -13.747,9.113 -13.165,9.113 U4.48 ; U4.48@-13.139,9.113 -12.446,9.113 ; U4.1 -12.402,9.45 -12.446,9.406 -12.446,9.113 ; U1.5 U1.6 -11.297,-8.819 -11.172,-8.694 C8.2 ; U4.35 -11.889,2.863 -11.889,3.36 ; U4.20 U4.21 ; C13.1 -4.997,4.268 -5.07,4.195 -5.146,4.195 -5.241,4.1 U4.23 -6.165,4.087 -6.835,4.087 -6.858,4.064 ; R9.2 -5.017,5.1 U4.21 ; C9.2 11.488,-9.594 11.613,-9.469 U2.6 U2.5 ; -12.446,9.113 -12.446,3.917 -11.889,3.36 ; -11.889,3.36 -11.77,3.479 -11.208,3.479 -7.189,3.479 -6.858,3.81 -6.858,4.064 ; -6.858,4.064 -6.858,4.916 -6.687,5.087 -6.165,5.087 U4.21
  Bottom Layer w0.508: -18.486,-4.247 -19.616,-3.117 -19.679,-3.054 -19.968,-2.765 -20.952,-1.781 -21.25,-1.781 -21.525,-1.506 -21.525,1.506 -21.255,1.775 -21.255,2.967 -22.225,3.937 v1(-22.225,5.334) -20.701,6.858 -20.701,8.382 -18.987,10.096 -18.987,11.239 -18.987,12.383 -12.954,18.415 10.414,18.415 12.827,18.415 18.186,13.056 18.186,11.659 20.193,9.652 20.193,8.133 19.746,7.686 ; -18.479,-4.255 -18.479,-6.032 -16.342,-8.169 U1.5 ; U2.6 14.28,-9.469 16.7,-7.048 19.621,-7.048 21.844,-4.826 21.844,5.588 19.746,7.686 ; U7.5 19.746,7.686
+5: C31.2 C32.2 D9.2 L3.2 R29.1 U3.3 U7.1 U7.3 | length 15.8
  Bottom Layer w0.152: U3.3 13.406,9.505 13.48,9.431 13.734,9.177 14.532,9.177 14.732,8.977 ; R29.1 18.078,0.298 18.542,0.762 D9.2
  Bottom Layer w0.381: U7.1 15.532,7.745 15.242,7.745 14.732,8.255 14.732,8.977 15.341,9.586 15.841,9.586 16.187,9.932 C32.2 ; D9.2@19.38,0.826 19.444,0.889 19.507,0.889 21.006,2.388 21.006,4.773 20.129,5.649 C31.2
CAN_H: P1.4 R3.2 U3.7 | length 6.4
  Top Layer w0.152: R3.2 10.666,5.351 10.812,5.351 11.43,5.969 12.801,5.969 13.055,5.715 v1(13.081,5.715) 13.081,5.691 14.061,4.711 P1.4
  Bottom Layer w0.152: U3.7 12.756,6.04 v1(13.081,5.715)
CAN_L: P1.3 R3.1 U3.6 | length 6.9
  Top Layer w0.152: R3.1 10.683,5.08 10.922,5.08 11.557,5.715 12.446,5.715 v1@13.033,5.128 ; P1.3 12.37,4.465 12.985,5.08 v1(13.081,5.08)
  Bottom Layer w0.152: v1(13.081,5.08) 13.589,5.588 13.589,6.429 13.486,6.531 13.48,6.531 13.406,6.605 U3.6
CAN_R: U3.4 U4.46 | length 35.4
  PowerAndSingle w0.152: v1(-14.605,8.636) -8.636,14.605 8.763,14.605 12.827,10.541 v1(14.097,10.541)
  Bottom Layer w0.152: v1(-14.605,8.636) -14.069,8.1 U4.46 ; U3.4 14.076,9.726 14.076,10.52 v1(14.097,10.541)
CAN_T: U3.1 U4.47 | length 31.6
  PowerAndSingle w0.152: v1(-13.97,8.636) -8.382,14.224 8.382,14.224 v1(12.065,10.541)
  Bottom Layer w0.152: v1(-13.97,8.636) -13.952,8.618 -13.17,8.618 U4.47 ; v1(12.065,10.541) 12.106,10.5 U3.1
CC1: R23.2 USB1.A5 | length 2.4
  Top Layer w0.152: v1(-16.383,0.635) -16.315,0.703 -16.315,1.051 -16.116,1.25 USB1.A5
  Bottom Layer w0.152: R23.2 -16.974,0.044 v1(-16.383,0.635)
CC2: R24.2 USB1.B5 | length 2
  Top Layer w0.152: v1(-16.383,-1.27) -15.977,-1.676 -15.379,-1.676 USB1.B5
  Bottom Layer w0.152: R24.2 -16.856,-1.406 -16.615,-1.406 -16.479,-1.27 v1(-16.383,-1.27)
DM: D15.1 U4.33 USB1.A7 USB1.B7 | length 9.4
  Top Layer w0.152: USB1.A7 -14.443,-0.25 -14.32,-0.127 v1(-14.224,-0.127) -14.244,-0.107 -14.244,0.528 -14.466,0.75 USB1.B7
  Bottom Layer w0.152: D15.1 -14.915,-0.281 -14.791,-0.157 -14.719,-0.157 -14.689,-0.127 -14.198,-0.127 -13.944,0.127 -11.938,0.127 -10.902,1.163 U4.33
DP: D17.1 R26.1 U4.34 USB1.A6 USB1.B6 | length 11.4
  Top Layer w0.152: USB1.B6 -16.141,-0.75 -16.141,-0.719 -16.352,-0.508 v1(-16.383,-0.508) -16.315,-0.44 -16.315,0.051 -16.116,0.25 USB1.A6
  Bottom Layer w0.152: R26.1 -16.974,-0.725 -16.852,-0.603 -16.574,-0.603 -16.543,-0.572 -16.447,-0.572 -16.315,-0.44 -16.315,-0.186 -15.889,0.24 -15.464,0.24 D17.1@-14.915,0.789 ; D17.1 D17.1@-14.915,0.789 ; U4.34 -11.402,1.298 -12.222,0.478 -14.604,0.478 D17.1@-14.915,0.789
GND: C1.2 C2.2 C3.2 C4.2 C5.2 C6.2 C8.1 C9.1 C10.2 C11.2 C12.2 C13.2 C14.1 C15.2 C16.2 C17.2 C18.1 C20.1 C21.1 C22.2 C23.2 C26.2 C27.1 C28.2 C29.2 C31.1 C32.1 C33.1 C34.1 C35.2 C36.2 D2.1 D4.2 D6.2 D7.2 D10.1 D11.1 D13.2 D14.2 D15.2 D17.2 D18.2 D19.2 JP1.0 JP1.2 JP2.0 JP2.2 JP3.0 JP3.2 P1.2 Q2.1 Q2.2 Q2.3 Q5.1 Q5.2 Q5.3 Q9.1 Q9.2 Q9.3 R4.2 R5.2 R8.2 R12.1 R21.1 R23.1 R24.1 R28.2 U1.4 U1.7 U2.4 U2.7 U3.2 U3.8 U3.9 U4.49 U5.6 U5.25 U6.12 U7.2 U8.2 USB1.A1 USB1.A12 USB1.B1 USB1.B12 | length 2.3
  Top Layer w0.254: v1(-18.923,-12.954) -18.874,-12.905 -18.874,-12.164 -18.594,-11.883 -18.415,-11.883 -18.157,-11.883 -17.722,-12.319 v1(-17.653,-12.319)
  other v1: -7.747,-21.59 -6.858,-21.59 6.858,-21.59 7.747,-21.59 -5.969,-21.336 5.969,-21.336 -5.588,-20.447 5.588,-20.447 -10.795,-20.289 10.795,-20.289 -12.192,-19.431 12.192,-19.431 -9.906,-19.304 9.906,-19.304 -6.477,-19.177 6.477,-19.177 -13.208,-18.669 13.208,-18.669 -11.049,-18.542 11.049,-18.542 -14.224,-17.907 14.224,-17.907 -12.192,-17.653 12.192,-17.653 -15.24,-17.018 15.24,-17.018 -13.335,-16.764 13.335,-16.764 -16.129,-16.129 16.129,-16.129 -17.018,-15.24 17.018,-15.24 -17.907,-14.224 17.907,-14.224 -16.764,-13.462 16.764,-13.462 18.923,-12.954 -6.096,-12.573 -5.334,-12.573 1.016,-12.573 1.778,-12.573 8.128,-12.573 8.89,-12.573 17.653,-12.319 -5.687,-12.065 1.425,-12.065 8.537,-12.065 -19.812,-11.684 19.812,-11.684 -6.096,-11.557 -5.334,-11.557 1.016,-11.557 1.778,-11.557 8.128,-11.557 8.89,-11.557 -18.415,-11.049 18.415,-11.049 -6.071,-10.414 -5.309,-10.414 1.041,-10.414 1.803,-10.414 8.153,-10.414 8.915,-10.414 -20.574,-9.906 -5.662,-9.906 1.45,-9.906 8.562,-9.906 20.574,-9.906 -17.272,-9.779 -6.071,-9.398 -5.309,-9.398 1.041,-9.398 1.803,-9.398 8.153,-9.398 8.915,-9.398 -20.447,-8.89 20.447,-8.89 -19.558,-8.255 19.558,-8.255 -12.954,-7.493 -16.637,-5.969 -7.493,-3.429 -6.477,-3.429 13.589,-3.302 14.986,-3.302 16.256,-3.302 -6.985,-2.921 -7.493,-2.413 -6.477,-2.413 20.955,-2.413 -19.558,-0.127 14.986,0.889 16.256,0.889 -14.224,1.524 19.558,2.159 19.558,2.794 20.193,2.794 -3.556,3.175 -17.78,5.08 -10.414,5.588 -8.89,5.588 -9.652,6.35 -10.414,7.112 -8.89,7.112 16.637,8.636 18.288,8.636 -17.78,10.033
  other v2: -6.085,-22.109 -4.307,-22.109 4.583,-22.109 -12.308,-16.775 -10.53,-16.775 -3.418,-16.775 10.806,-16.775 12.584,-16.775 -16.753,-11.441 -11.419,-11.441 17.029,-11.441 -14.086,-9.663 16.14,-9.663 9.917,-7.885 17.029,-7.885 20.585,-7.885 -21.198,-6.107 -19.42,-6.107 17.918,-6.107 -22.087,-4.329 20.585,-4.329 -17.642,-2.551 12.584,-2.551 14.362,-2.551 -0.751,-0.773 1.027,-0.773 2.805,-0.773 -1.64,1.005 0.138,1.005 1.916,1.005 3.694,1.005 -20.309,2.783 -6.085,2.783 -1.64,4.561 3.694,4.561 16.14,4.561 1.027,6.339 2.805,6.339 4.583,6.339 6.361,6.339 8.139,6.339 0.138,8.117 1.916,8.117 3.694,8.117 5.472,8.117 7.25,8.117 9.028,8.117 -20.309,9.895 -6.085,9.895 -4.307,9.895 -2.529,9.895 -0.751,9.895 1.027,9.895 2.805,9.895 4.583,9.895 6.361,9.895 8.139,9.895 17.029,9.895 -15.864,11.673 -5.196,11.673 -3.418,11.673 -1.64,11.673 0.138,11.673 1.916,11.673 3.694,11.673 5.472,11.673 7.25,11.673 16.14,11.673 19.696,11.673 -16.753,13.451 -10.53,15.229 -8.752,15.229 -6.974,15.229 -5.196,15.229 -3.418,15.229 -1.64,15.229 0.138,15.229 1.916,15.229 3.694,15.229 5.472,15.229 7.25,15.229 9.028,15.229 -13.197,17.007 -11.419,17.007 -9.641,17.007 -7.863,17.007 -6.085,17.007 -4.307,17.007 -2.529,17.007 -0.751,17.007 1.027,17.007 2.805,17.007 4.583,17.007 6.361,17.007 8.139,17.007 9.917,17.007 11.695,17.007 15.251,17.007 -9.641,20.563 -7.863,20.563 -6.085,20.563 -4.307,20.563 4.583,20.563 6.361,20.563 8.139,20.563 9.917,20.563 -5.196,22.341 -3.418,22.341 -1.64,22.341 0.138,22.341 1.916,22.341 3.694,22.341
GVDD: C16.1 C18.2 D1.1 D2.2 D3.1 D8.1 R11.2 U5.4 | length 30.3
  PowerAndSingle w0.254: v1(-11.684,-4.572) -11.684,-3.81 v1(-6.477,1.397) -6.488,1.408 -5.356,2.54 3.81,2.54 v1(5.715,4.445)
  Bottom Layer w0.254: D1.1 D3.1 D8.1 ; C16.1 -12.37,-3.592 D8.1 ; v1(-11.684,-4.572) D8.1 ; U5.4 -6.735,0.357 -6.492,0.601 C18.2 -6.492,1.382 v1(-6.477,1.397) ; v1(5.715,4.445) 5.723,4.453 6.469,4.453 R11.2 6.858,4.46 6.873,4.445 D2.2
HIN1: U4.32 U5.22 | length 6.5
  Bottom Layer w0.152: U4.32 -10.402,-1.917 -9.648,-2.671 U5.22
HIN2: U4.31 U5.23 | length 5.7
  Bottom Layer w0.152: U4.31 -9.902,-1.782 -9.517,-2.167 -8.989,-2.167 U5.23
HIN3: U4.30 U5.24 | length 4.8
  Bottom Layer w0.152: U4.30 -9.402,-1.514 -9.245,-1.671 U5.24
I_Sense_U: C7.1 Q1.1 Q1.2 Q1.3 Q2.5 Q2.6 Q2.7 Q2.8 Q2.9 R1.1 U1.2 U5.18 | length 34
  Bottom Layer w0.152: U1.2 -19.335,-9.469 -19.685,-9.819 -19.685,-10.235 ccw(c-19.51,-10.235) -19.656,-10.331 -17.789,-13.194 ; -17.769,-13.22 -14.605,-16.51 -11.184,-19.171 ; -11.168,-19.182 -8.65,-20.693 -6.711,-20.693 -6.608,-20.591 -6.608,-20.105 -7.059,-19.653 -7.426,-19.653 R1.1
  Bottom Layer w0.254: C7.1 -8.367,-7.635 -7.112,-8.89 -7.112,-14.859 -6.841,-15.13 -5.909,-15.13 Q2.9 ; C7.1@-8.279,-6.858 -8.235,-6.814 U5.18
I_Sense_W: C25.1 Q8.1 Q8.2 Q8.3 Q9.5 Q9.6 Q9.7 Q9.8 Q9.9 R2.2 U2.3 U5.12 | length 44.4
  Bottom Layer w0.152: R2.2 7.384,-19.695 6.975,-19.695 6.614,-20.056 6.614,-20.598 6.717,-20.701 8.588,-20.701 8.637,-20.701 8.678,-20.676 11.168,-19.182 ; 11.184,-19.171 14.605,-16.51 17.769,-13.22 ; 17.789,-13.194 19.656,-10.331 ccw(c19.51,-10.235) 19.685,-10.235 19.685,-9.815 19.339,-9.469 U2.3
  Bottom Layer w0.254: U5.12 -4.985,-5.302 -4.01,-6.277 -4.01,-6.643 C25.1 -3.876,-6.939 -3.634,-7.181 -3.634,-7.239 1.651,-7.239 3.048,-8.636 6.477,-8.636 7.112,-9.271 7.112,-14.732 7.383,-15.003 8.188,-15.003 Q9.9
I_U: R10.2 U1.8 | length 26.8
  PowerAndSingle w0.152: v1(-13.462,-10.16) -13.462,-3.937 -11.176,-1.651 -11.176,9.271 v1(-7.874,12.573)
  Bottom Layer w0.152: v1(-13.462,-10.16) -13.442,-10.14 -12.334,-10.14 U1.8 ; R10.2 v1(-7.874,12.573)
I_W: R14.2 U2.8 | length 41.3
  PowerAndSingle w0.152: v1(-6.985,12.573) 7.874,12.573 15.621,4.826 15.621,-5.715 v1(13.462,-7.874)
  Bottom Layer w0.152: R14.2 v1(-6.985,12.573) ; U2.8 13.167,-8.169 v1(13.462,-7.874)
LED_G: R6.1 U4.45 | length 6.3
  PowerAndSingle w0.152: v1(-18.669,7.239) -17.907,7.239 -17.526,7.62 v1(-13.97,7.62)
  Bottom Layer w0.152: v1(-18.669,7.239) -18.625,7.195 R6.1 ; v1(-13.97,7.62) -13.95,7.6 U4.45
LED_R: R7.1 U4.44 | length 7.3
  PowerAndSingle w0.152: v1(-18.669,5.207) -18.669,5.842 -17.399,7.112 v1(-14.351,7.112)
  Bottom Layer w0.152: v1(-18.669,5.207) -18.625,5.251 R7.1 ; v1(-14.351,7.112) -13.564,7.112 -13.552,7.1 U4.44
LIN1: U4.28 U5.1 | length 3.8
  Bottom Layer w0.152: U4.28 -8.402,0.008 -8.235,-0.159 -8.235,-0.413 -8.235,-0.667 U5.1
LIN2: U4.27 U5.2 | length 3.8
  Bottom Layer w0.152: U4.27 -7.902,0.008 -7.735,-0.159 -7.735,-0.413 -7.735,-0.667 U5.2
LIN3: U4.26 U5.3 | length 3.8
  Bottom Layer w0.152: U4.26 -7.402,0.008 -7.235,-0.159 -7.235,-0.413 -7.235,-0.667 U5.3
LO1: Q2.4 U5.11 | length 11
  Ground w0.254: v1(-4.318,-9.525) -4.318,-9.481 -4.064,-9.227 v1(-4.064,-5.334)
  Bottom Layer w0.254: U5.11 -4.235,-3.671 -4.064,-3.842 v1(-4.064,-5.334) ; Q2.4 -4.339,-13.742 -4.339,-9.546 v1(-4.318,-9.525)
LO2: Q5.4 U5.10 | length 17.1
  Ground w0.254: v1(2.794,-10.033) v1(2.794,-7.493)
  Bottom Layer w0.254: U5.10 -4.068,-3.171 -3.564,-3.675 -3.564,-5.834 -2.667,-6.731 2.032,-6.731 v1(2.794,-7.493) ; Q5.4 2.794,-13.721 v1(2.794,-10.033)
LO3: Q9.4 U5.9 | length 23.6
  Bottom Layer w0.254: U5.9 -3.868,-2.671 -3.048,-3.491 -3.048,-5.715 -2.54,-6.223 2.413,-6.223 4.318,-8.128 9.017,-8.128 9.865,-8.976 Q9.4
MOTOR_U: pad.6@-2.54,-20.32 pad.7@-2.54,-21.59 R1.2 U1.3 | length 23.3
  Bottom Layer w0.152: U1.3 -18.449,-8.847 -19.515,-8.847 -20.066,-9.398 -20.066,-10.361 ccw(c-19.891,-10.361) -20.037,-10.458 -18.043,-13.449 ; -18.023,-13.473 -14.741,-16.882 ; -14.722,-16.899 -11.44,-19.424 ; -11.42,-19.437 -8.763,-20.947 -6.596,-20.947 -6.342,-20.693 -6.342,-20.058 -5.916,-19.632 -5.507,-19.632 R1.2
MOTOR_V: C19.1 pad.6@0,-20.32 pad.7@0,-21.59 Q4.1 Q4.2 Q4.3 Q5.5 Q5.6 Q5.7 Q5.8 Q5.9 U5.15 | length 17.3
  Bottom Layer w0.254: U5.15 -6.735,-5.584 -6.296,-6.023 -6.296,-6.643 -6.064,-6.875 -6.064,-7.525 -5.334,-8.255 -1.016,-8.255 0,-9.271 0,-14.732 0.271,-15.003 1.076,-15.003 Q5.9
MOTOR_W: pad.6@2.54,-20.32 pad.7@2.54,-21.59 R2.1 U2.2 | length 23.3
  Bottom Layer w0.152: R2.1 5.507,-19.632 5.916,-19.632 6.342,-20.058 6.342,-20.693 6.604,-20.955 8.749,-20.955 11.42,-19.437 ; 11.44,-19.424 14.722,-16.899 ; 14.741,-16.882 18.023,-13.473 ; 18.043,-13.449 20.037,-10.458 ccw(c19.891,-10.361) 20.066,-10.361 20.066,-9.398 19.487,-8.819 U2.2
NetC7_2: C7.2 D1.2 U5.20 | length 4.8
  Bottom Layer w0.254: D1.2 -10.49,-6.858 -9.794,-6.858 C7.2 -9.667,-3.88 -9.471,-3.684 -8.998,-3.684 U5.20
NetC14_2: C14.2 R10.1 U4.10 | length 2.2
  Bottom Layer w0.152: C14.2 -8.738,11.132 R10.1 -7.902,11.104 U4.10
NetC17_1: C17.1 R14.1 U4.12 | length 2.2
  Bottom Layer w0.152: U4.12 -6.902,11.049 R14.1 -6.96,11.107 C17.1
NetC19_2: C19.2 D3.2 U5.17 | length 7
  Ground w0.254: v1(-10.16,-5.715) -9.271,-5.715 v1(-7.366,-7.62)
  Bottom Layer w0.254: D3.2 v1(-10.16,-5.715) ; U5.17 -7.735,-5.854 -7.398,-6.191 -7.398,-6.841 C19.2 -7.381,-7.605 v1(-7.366,-7.62)
NetC22_1: C22.1 D6.1 JP1.3 R17.2 | length 6.5
  Bottom Layer w0.152: JP1.3 -20.476,0.489 -18.097,0.489 -17.983,0.603 -17.946,0.603 C22.1@-17.824,0.725 ; C22.1 -17.824,1.551 D6.1 -17.724,1.751 -17.235,2.24 -16.396,2.24 -16.002,2.634 -15.671,2.965 R17.2
NetC23_1: C23.1 D7.1 JP1.4 R18.2 | length 7.6
  Bottom Layer w0.152: JP1.4 -19.742,1.2 -19.614,1.072 -18.696,1.072 -18.288,1.48 -18.288,2.433 -18.117,2.604 C23.1 -18.117,2.704 -17.995,2.826 -17.958,2.826 -17.341,3.443 -15.374,3.443 -14.896,2.965 R18.2
NetC24_1: C24.1 D5.2 Q6.1 Q6.2 Q6.3 Q7.1 Q7.2 Q7.3 R19.2 | length 4.1
  Bottom Layer w0.152: R19.2 4.184,-2.33 4.362,-2.508 4.362,-2.544 4.536,-2.718 4.658,-2.718 4.916,-2.459 Q6.1 ; Q7.1 7.96,-1.357 8.083,-1.48 C24.1
NetC24_2: C24.2 D5.1 Q6.4 Q7.4 R19.1 R21.2 | length 10.7
  Bottom Layer w0.152: R19.1 4.184,-1.48 4.362,-1.302 4.362,-1.266 4.536,-1.092 D5.1 ; R21.2 D5.1 ; Q6.4 7.96,-2.453 8.083,-2.33 9.321,-2.33 9.779,-1.872 9.779,-1.143 9.398,-0.762 6.181,-0.762 6.078,-0.865 6.078,-1.282 Q7.4 4.916,-1.351 4.658,-1.092 D5.1
NetC25_2: C25.2 D8.2 U5.14 | length 10.1
  Ground w0.254: v1(-10.16,-4.572) -8.128,-4.572 v1(-5.08,-7.62)
  Bottom Layer w0.254: D8.2 v1(-10.16,-4.572) ; U5.14 -6.235,-5.449 -5.31,-6.374 -5.31,-6.643 C25.2 -5.095,-7.605 v1(-5.08,-7.62)
NetC27_2: C27.2 D9.1 L2.2
NetC28_1: C28.1 D13.1 JP2.1 R20.2 | length 8.9
  Top Layer w0.152: JP2.1 -15.695,-9.091 v1(-14.097,-7.493)
  Bottom Layer w0.152: v1(-14.097,-7.493) -14.069,-7.465 -14.069,-6.886 D13.1 -14.141,-6.758 C28.1 -14.032,-5.86 -14.032,-5.523 -13.843,-5.334 -13.208,-5.334 -12.954,-5.08 R20.2
NetC29_1: C29.1 D12.1 D14.1 JP2.3 | length 5.5
  Top Layer w0.152: JP2.3 -16.683,-7.108 -15.931,-7.108 -15.927,-7.112 -15.463,-7.112 -15.082,-7.493 v1(-14.986,-7.493)
  Bottom Layer w0.152: v1(-14.986,-7.493) -15.014,-7.465 -15.014,-6.886 D14.1 -14.942,-6.758 C29.1@-14.942,-5.932 ; C29.1 C29.1@-14.942,-5.932 ; D12.1 -13.752,-4.75 -13.926,-4.924 -13.926,-4.953 -14.783,-5.81 -14.82,-5.81 C29.1@-14.942,-5.932
NetC30_1: C30.1 U8.1 | length 2.5
  Bottom Layer w0.254: U8.1 17.206,0.569 17.892,1.255 18.342,1.255 C30.1
NetC30_2: C30.2 L3.1 U8.6
NetC34_2: C34.2 D16.2 U8.4 U8.5 | length 4.8
  Bottom Layer w0.508: D16.2 12.443,3.175 13.525,2.093 C34.2
NetC35_1: C35.1 D18.1 JP3.1 R25.2 | length 5.2
  Top Layer w0.152: v1(-18.161,8.001) -18.065,8.001 -17.804,7.74 -17.731,7.74 JP3.1
  Bottom Layer w0.152: v1(-18.161,8.001) -18.153,7.993 -17.772,7.993 -17.074,7.295 D18.1 -17.074,5.942 C35.1 R25.2
NetC36_1: C36.1 D19.1 JP3.3 R27.2 | length 5.7
  Top Layer w0.152: v1(-17.78,8.763) -17.251,9.292 -16.178,9.292 JP3.3
  Bottom Layer w0.152: v1(-17.78,8.763) -17.272,8.255 D19.1 -16.173,8.155 C36.1 -16.173,6.854 R27.2
NetD4_1: D4.1 JP1.1 L1.2 | length 2.6
  Bottom Layer w0.254: JP1.1 -19.501,-1.2 -19.319,-1.382 -18.869,-1.382 L1.2 ; L1.2@-18.796,-1.328 D4.1
NetD12_2: D12.2 R22.2 | length 1
  Bottom Layer w0.152: D12.2 R22.2
NetLED1_2: LED1.2 R6.2 | length 1.6
  Top Layer w0.152: LED1.2 -20.758,6.393 -20.451,6.282 -20.233,6.282 v1(-20.203,6.252)
  Bottom Layer w0.152: v1(-20.203,6.252) -19.85,6.604 R6.2
NetLED2_2: LED2.2 R7.2 | length 1.8
  Top Layer w0.152: LED2.2 -20.873,5.65 -20.382,5.65 v1(-20.32,5.588)
  Bottom Layer w0.152: v1(-20.32,5.588) -20.252,5.656 -19.701,5.656 -19.675,5.683 -19.597,5.683 -19.475,5.805 R7.2
NetQ1_4: Q1.4 U5.19 | length 13.9
  Bottom Layer w0.254: Q1.4 -9.865,-16.543 -10.712,-15.696 -10.712,-10.712 -10.287,-10.287 -10.287,-8.89 -8.985,-7.588 U5.19
NetQ4_4: Q4.4 U5.16 | length 14.8
  Bottom Layer w0.254: U5.16 -7.235,-5.719 -6.771,-6.183 -6.771,-7.728 -5.736,-8.763 -4.134,-8.763 -3.6,-9.297 -3.6,-15.696 -2.753,-16.543 Q4.4
NetQ8_4: Q8.4 U5.13 | length 19.4
  Bottom Layer w0.254: U5.13 -5.735,-5.244 -4.445,-6.534 -4.445,-7.366 -4.064,-7.747 1.397,-7.747 3.512,-9.862 3.512,-15.95 4.359,-16.797 Q8.4
NetR5_1: R5.1 U5.21 | length 2.1
  Bottom Layer w0.152: R5.1 -10.751,-2.45 -10.629,-2.572 -10.592,-2.572 -9.993,-3.171 U5.21
NetR28_1: R28.1 R29.2 U8.3 | length 3.8
  Bottom Layer w0.152: U8.3 15.306,-0.661 15.788,-1.143 16.77,-1.143 17.228,-1.601 17.228,-1.701 17.795,-2.268 17.956,-2.268 18.078,-2.39 R28.1
NRST: C21.2 R16.1 U4.7 | length 7.7
  Bottom Layer w0.152: C21.2 -16.165,10.055 -13.313,10.055 -12.7,10.668 -9.652,10.668 -9.398,10.414 U4.7@-9.398,9.854
PWM_CH1: R25.1 U4.42 | length 2.3
  Bottom Layer w0.152: R25.1 -15.323,5.879 -15.201,6.001 -15.164,6.001 -15.065,6.1 U4.42
PWM_CH2: R27.1 U4.43 | length 2.2
  Bottom Layer w0.152: R27.1 -13.556,6.604 -13.552,6.6 U4.43
SPI_CLK: U4.13 U6.7 | length 11.2
  Bottom Layer w0.152: U4.13 -2.877,9.1 1.625,4.598 U6.7
SPI_CSn: U4.16 U6.8 | length 11.4
  PowerAndSingle w0.152: v1(-4.826,7.62) -3.175,7.62 0.762,3.683 1.778,3.683 v1(2.286,4.191)
  Bottom Layer w0.152: U4.16 -6.142,7.61 -4.836,7.61 v1(-4.826,7.62) ; U6.8 2.275,3.754 2.286,3.765 v1(2.286,4.191)
SPI_MISO: U4.14 U6.5 | length 10.1
  Bottom Layer w0.152: U4.14 -6.148,8.604 -5.62,8.604 -5.461,8.763 -3.302,8.763 0.325,5.136 U6.5
SPI_MOSI: U4.15 U6.6 | length 10
  PowerAndSingle w0.152: v1(-5.207,8.128) -2.921,8.128 v1(1.016,4.191)
  Bottom Layer w0.152: U4.15 -6.138,8.114 -5.221,8.114 v1(-5.207,8.128) ; U6.6 0.975,4.15 v1(1.016,4.191)
SWDCLK: R17.1 U4.37 | length 3
  Bottom Layer w0.152: R17.1@-15.584,2.115 -15.159,2.54 -14.472,2.54 -13.878,3.134 -13.412,3.6 U4.37
SWDIO: R18.1 U4.36 | length 2.8
  Bottom Layer w0.152: R18.1 -14.395,2.115 -13.66,2.85 U4.36
UART_RX: R20.1 U4.40 | length 7.7
  PowerAndSingle w0.152: v1(-14.097,5.08) -12.954,3.937 v1(-12.954,-0.635)
  Bottom Layer w0.152: v1(-14.097,5.08) -14.077,5.1 U4.40 ; R20.1 v1(-12.954,-0.635)
UART_TX: R22.1 U4.39 | length 6.8
  PowerAndSingle w0.152: v1(-14.097,4.445) -13.716,4.064 v1(-13.716,-0.635)
  Bottom Layer w0.152: v1(-14.097,4.445) -14.001,4.445 -13.846,4.6 U4.39 ; R22.1 v1(-13.716,-0.635)
VBAT: C1.1 C2.1 C3.1 C4.1 C5.1 C6.1 D16.1 Q1.5 Q1.6 Q1.7 Q1.8 Q1.9 Q4.5 Q4.6 Q4.7 Q4.8 Q4.9 Q7.5 Q7.6 Q7.7 Q7.8 Q7.9 Q8.5 Q8.6 Q8.7 Q8.8 Q8.9 R11.1 R13.2 | length 6.9
  PowerAndSingle w0.152: -4.169,-4.852 v1(-4.169,1.419)
  Bottom Layer w0.152: v1(-4.169,1.419) -4.169,2.01 R13.2
  other v1: -9.652,-12.319 -2.54,-12.319 4.572,-12.319 -9.652,-11.684 -2.54,-11.684 4.572,-11.684 -9.652,-11.049 -2.54,-11.049 4.572,-11.049 -9.652,-10.414 -2.54,-10.414 4.572,-10.414 -9.652,-9.779 -2.54,-9.779 4.572,-9.779 6.223,0 6.985,0 7.747,0 6.223,0.635 6.985,0.635 7.747,0.635 6.223,1.27 6.985,1.27 7.747,1.27
VBAT_IN: C26.1 D10.2 P1.1 Q6.5 Q6.6 Q6.7 Q6.8 Q6.9
VBUS: D11.2 L2.1 USB1.A4 USB1.A9 USB1.B4 USB1.B9 | length 67.2
  Top Layer w0.381: USB1.A4@-15.3,2.309 USB1.B9 -16.242,2.3 -17.018,1.524 -17.018,-1.524 -16.242,-2.3 USB1.B4 -15.296,-2.309 -14.721,-2.309 -14.641,-2.389 -14.375,-2.389 v1(-14.351,-2.413)
  PowerAndSingle w0.381: v1(-14.351,-2.413) -13.335,-2.413 -12.192,-1.27 -12.192,9.652 -8.128,13.716 8.001,13.716 13.704,8.013 17.145,4.572 17.145,-0.127 v1(19.431,-2.413)
  Bottom Layer w0.381: D11.2 19.358,-3.505 L2.1 v1(19.431,-2.413)
VersionDetect_A: C11.1 R8.1 R9.1 U4.19 | length 2.8
  Bottom Layer w0.152: U4.19 -5.229,6.1 -5.015,5.886 C11.1 R8.1
VersionDetect_D: R4.1 U4.18 | length 1.2
  Bottom Layer w0.152: U4.18 -5.752,6.6 -5.748,6.604 R4.1
VSENSE: C15.1 R12.2 R13.1 U4.24 | length 2.7
  Bottom Layer w0.152: U4.24 -5.066,3.6 -5.009,3.544 -5.009,2.806 R12.2 R13.1
pads on no net: U1.1 U2.1 U4.2 U4.3 U4.4 U4.5 U4.6 U4.8 U4.9 U4.11 U4.17 U4.22 U4.25 U4.29 U4.38 U4.41 U5.5 U5.7 U5.8 U6.1 U6.2 U6.3 U6.4 U6.10 U6.11 U6.13 U6.14 U6.15 U6.16 U7.4 USB1. USB1.0 USB1.A8 USB1.B8

## Polygon pours and split planes (outlines as drawn)
NetC34_2 on Bottom Layer "NONET_L-01_P-001" (solid, pour order 85): 13.589,2.794 13.081,2.794 12.954,2.667 12.954,1.651 13.081,1.524 16.383,1.524 16.637,1.778 16.637,2.667 16.51,2.794
GND on Bottom Layer "NONET_L-01_P-001" (solid, pour order 91): 0,-23.5 cw(c0,0) -23.5,0 cw(c0,0) 0,23.5 cw(c0,0) 23.5,0 cw(c0,0)
VBAT on Bottom Layer "NONET_L-01_P-001" (solid, pour order 81): 8.382,1.397 8.382,3.302 8.001,3.683 5.969,3.683 5.588,3.302 5.588,-0.381 5.715,-0.508 8.128,-0.508 8.382,-0.254
NetC27_2 on Bottom Layer "NONET_L-01_P-001" (solid, pour order 90): 21.463,0.889 21.209,1.143 20.701,1.143 19.812,0.254 18.796,0.254 18.542,0 18.542,-1.143 18.796,-1.397 20.066,-1.397 20.574,-0.889 21.209,-0.889 21.463,-0.635
VBAT_IN on Bottom Layer "NONET_L-01_P-001" (solid, pour order 76): 12.827,-3.937 16.51,-3.937 16.891,-4.318 16.891,-5.842 16.51,-6.223 5.842,-6.223 5.588,-5.969 5.588,-3.556 5.842,-3.302 9.398,-3.302 9.906,-2.794 11.684,-2.794
NetC30_2 on Bottom Layer "NONET_L-01_P-001" (solid, pour order 84): 18.542,4.064 16.002,4.064 15.748,3.81 15.748,3.175 16.002,2.921 16.51,2.921 16.764,2.667 16.764,1.778 17.018,1.524 17.526,1.524 17.907,1.905 18.669,1.905 18.796,2.032 18.796,3.81
+5 on Bottom Layer "NONET_L-01_P-001" (solid, pour order 83): 17.526,6.604 16.002,8.128 15.113,8.128 14.859,7.874 14.859,6.096 15.875,5.08 20.447,5.08 20.701,5.334 20.701,5.969 20.066,6.604
NetC24_1 on Bottom Layer "NONET_L-01_P-001" (solid, pour order 77): 6.477,-0.889 6.35,-1.016 6.35,-1.778 6.223,-1.905 5.842,-1.905 5.715,-2.032 5.715,-2.794 5.842,-2.921 7.493,-2.921 7.62,-2.794 7.62,-2.032 7.747,-1.905 8.128,-1.905 8.255,-1.778 8.255,-1.016 8.128,-0.889
VBAT on Bottom Layer "NONET_L-01_P-001" (solid, pour order 39): 3.81,-9.525 4.318,-9.017 6.223,-9.017 6.731,-9.525 6.731,-15.875 6.477,-16.129 4.191,-16.129 3.81,-15.748
VBAT on Bottom Layer "NONET_L-01_P-001" (solid, pour order 49): -10.414,-9.779 -9.652,-9.017 -8.001,-9.017 -7.493,-9.525 -7.493,-15.875 -7.747,-16.129 -10.033,-16.129 -10.414,-15.748
MOTOR_U on Bottom Layer "NONET_L-01_P-001" (solid, pour order 66): -5.842,-18.542 -5.842,-19.812 -5.588,-20.066 -3.937,-20.066 -3.556,-20.447 -3.556,-21.971 -3.048,-22.479 -2.159,-22.479 -1.651,-21.971 -1.651,-18.796 -2.159,-18.288 -5.588,-18.288
I_Sense_W on Bottom Layer "NONET_L-01_P-001" (solid, pour order 54): 10.16,-18.288 8.382,-20.066 7.366,-20.066 7.112,-19.812 7.112,-18.542 6.35,-17.78 5.08,-17.78 4.699,-17.399 4.699,-16.383 4.826,-16.256 6.604,-16.256 6.985,-15.875 6.985,-14.859 7.112,-14.732 10.033,-14.732 10.16,-14.859
VBAT on Bottom Layer "NONET_L-01_P-001" (solid, pour order 70): -3.302,-9.525 -2.794,-9.017 -0.889,-9.017 -0.381,-9.525 -0.381,-15.875 -0.635,-16.129 -2.921,-16.129 -3.302,-15.748
MOTOR_W on Bottom Layer "NONET_L-01_P-001" (solid, pour order 67): 5.842,-18.542 5.842,-19.812 5.588,-20.066 3.937,-20.066 3.556,-20.447 3.556,-21.971 3.048,-22.479 2.159,-22.479 1.655,-21.975 1.655,-18.792 2.159,-18.288 5.588,-18.288
MOTOR_V on Bottom Layer "NONET_L-01_P-001" (solid, pour order 55): 0.889,-22.225 0.381,-22.733 -0.381,-22.733 -0.889,-22.225 -0.889,-18.923 -2.413,-17.399 -2.413,-16.383 -2.286,-16.256 -0.508,-16.256 -0.127,-15.875 -0.127,-14.859 0,-14.732 2.921,-14.732 3.175,-14.986 3.175,-17.145 2.921,-17.399 2.413,-17.399 0.889,-18.923
I_Sense_U on Bottom Layer "NONET_L-01_P-001" (solid, pour order 53): -9.525,-18.923 -8.382,-20.066 -7.366,-20.066 -7.112,-19.812 -7.112,-18.542 -5.969,-17.399 -4.191,-17.399 -3.937,-17.145 -3.937,-14.986 -4.191,-14.732 -7.112,-14.732 -7.239,-14.859 -7.239,-15.875 -7.62,-16.256 -9.398,-16.256 -9.525,-16.383
GND on Ground "NONET_L-01_P-001" (solid, pour order 64): 0,-23.5 cw(c0,0) -23.5,0 cw(c0,0) 0,23.5 cw(c0,0) 23.5,0 cw(c0,0)
GND on Top Layer "NONET_L-01_P-001" (solid, pour order 89): 0,-23.5 cw(c0,0) -23.5,0 cw(c0,0) 0,23.5 cw(c0,0) 23.5,0 cw(c0,0)
VBAT on Top Layer "NONET_L-01_P-001" (solid, pour order 78): 5.207,-1.397 5.207,2.032 5.588,2.413 8.382,2.413 8.763,2.032 8.763,-6.604 7.366,-8.001 7.366,-12.573 6.477,-13.462 -9.398,-13.462 -10.16,-12.7 -10.16,-5.334 -9.398,-4.572 2.032,-4.572
GND on PowerAndSingle "NONET_L-01_P-001" (solid, pour order 88): 0,-23.5 cw(c0,0) -23.5,0 cw(c0,0) 0,23.5 cw(c0,0) 23.5,0 cw(c0,0)
VBAT on PowerAndSingle "NONET_L-01_P-001" (solid, pour order 86): 5.207,-1.397 5.207,2.032 5.588,2.413 8.382,2.413 8.763,2.032 8.763,-6.604 7.366,-8.001 7.366,-12.573 6.477,-13.462 -9.398,-13.462 -10.16,-12.7 -10.16,-5.334 -9.398,-4.572 2.032,-4.572

## Keep-outs
Keep-Out Layer:
  circle w0.254: c0,0 r23.5
  lines w0.254: -1.874,21.418 cw(c0,0) 1.874,21.418 cw(c1.799,20.421) 1.7,19.426 ccw(c0,0) -1.7,19.426 cw(c-1.799,20.421) -1.874,21.418

## Silkscreen, mask and mechanical layers (free items; w line width, h text height)
Top Overlay:
  drawing of 9 lines, arcs and shapes, not listed
  text "A G V" at -14.681,8.93 h1.02 r243
  text "Ver6.2" at -1.358,6.297 h2.54 r90
  text "L H" at 11.567,5.493 h1.02
  text "7~26V" at 8.421,-5.3 h2.54 r90
  text "T G R" at -15.978,-6.384 h1.02 r297
  text "Liuhaoqi" at 1.694,-12.997 h2.92 r90
  text "Designed by" at -1.63,-13.118 h1.78 r90
  text "QDrive 4310" at -4.388,-13.235 h7.37 r90
Bottom Overlay:
  drawing of 9 lines, arcs and shapes, not listed
  text "C D" at -22.671,3.177 h1.4 r270
  text "V G" at -22.671,-5.228 h1.4 r270
Mechanical Document:
  circle w0.254: c13.589,-13.589 r2.5
  circle w0.254: c13.612,-13.612 r1.025
  circle w0.254: c-13.612,-13.612 r1.025
  circle w0.254: c13.612,13.612 r1.025
  circle w0.254: c-13.612,13.612 r1.025
  circle w0.254: c0,0 r24.5
  circle w0.254: c0,0 r23.5
  circle w0.254: c0,0 r8.3
  circle w0.254: c0,0 r4.7
  circle w0.254: c0,0 r2.6
  lines w0.254: -8,-20.2 ccw(c-6,-20.2) -6,-22.2 6,-22.2 ccw(c6,-20.2) 8,-20.2 8,-13.2 ccw(c6,-13.2) 6,-11.2 -6,-11.2 ccw(c-6,-13.2) -8,-13.2 -8,-20.2 ; -3.29,-20.051 ccw(c-2.54,-20.051) -1.79,-20.051 -1.79,-19.051 ccw(c-2.54,-19.051) -3.29,-19.051 -3.29,-20.051 ; -0.75,-20.051 ccw(c0,-20.051) 0.75,-20.051 0.75,-19.051 ccw(c0,-19.051) -0.75,-19.051 -0.75,-20.051 ; 1.79,-20.051 ccw(c2.54,-20.051) 3.29,-20.051 3.29,-19.051 ccw(c2.54,-19.051) 1.79,-19.051 1.79,-20.051